# Allegro board dev.brd
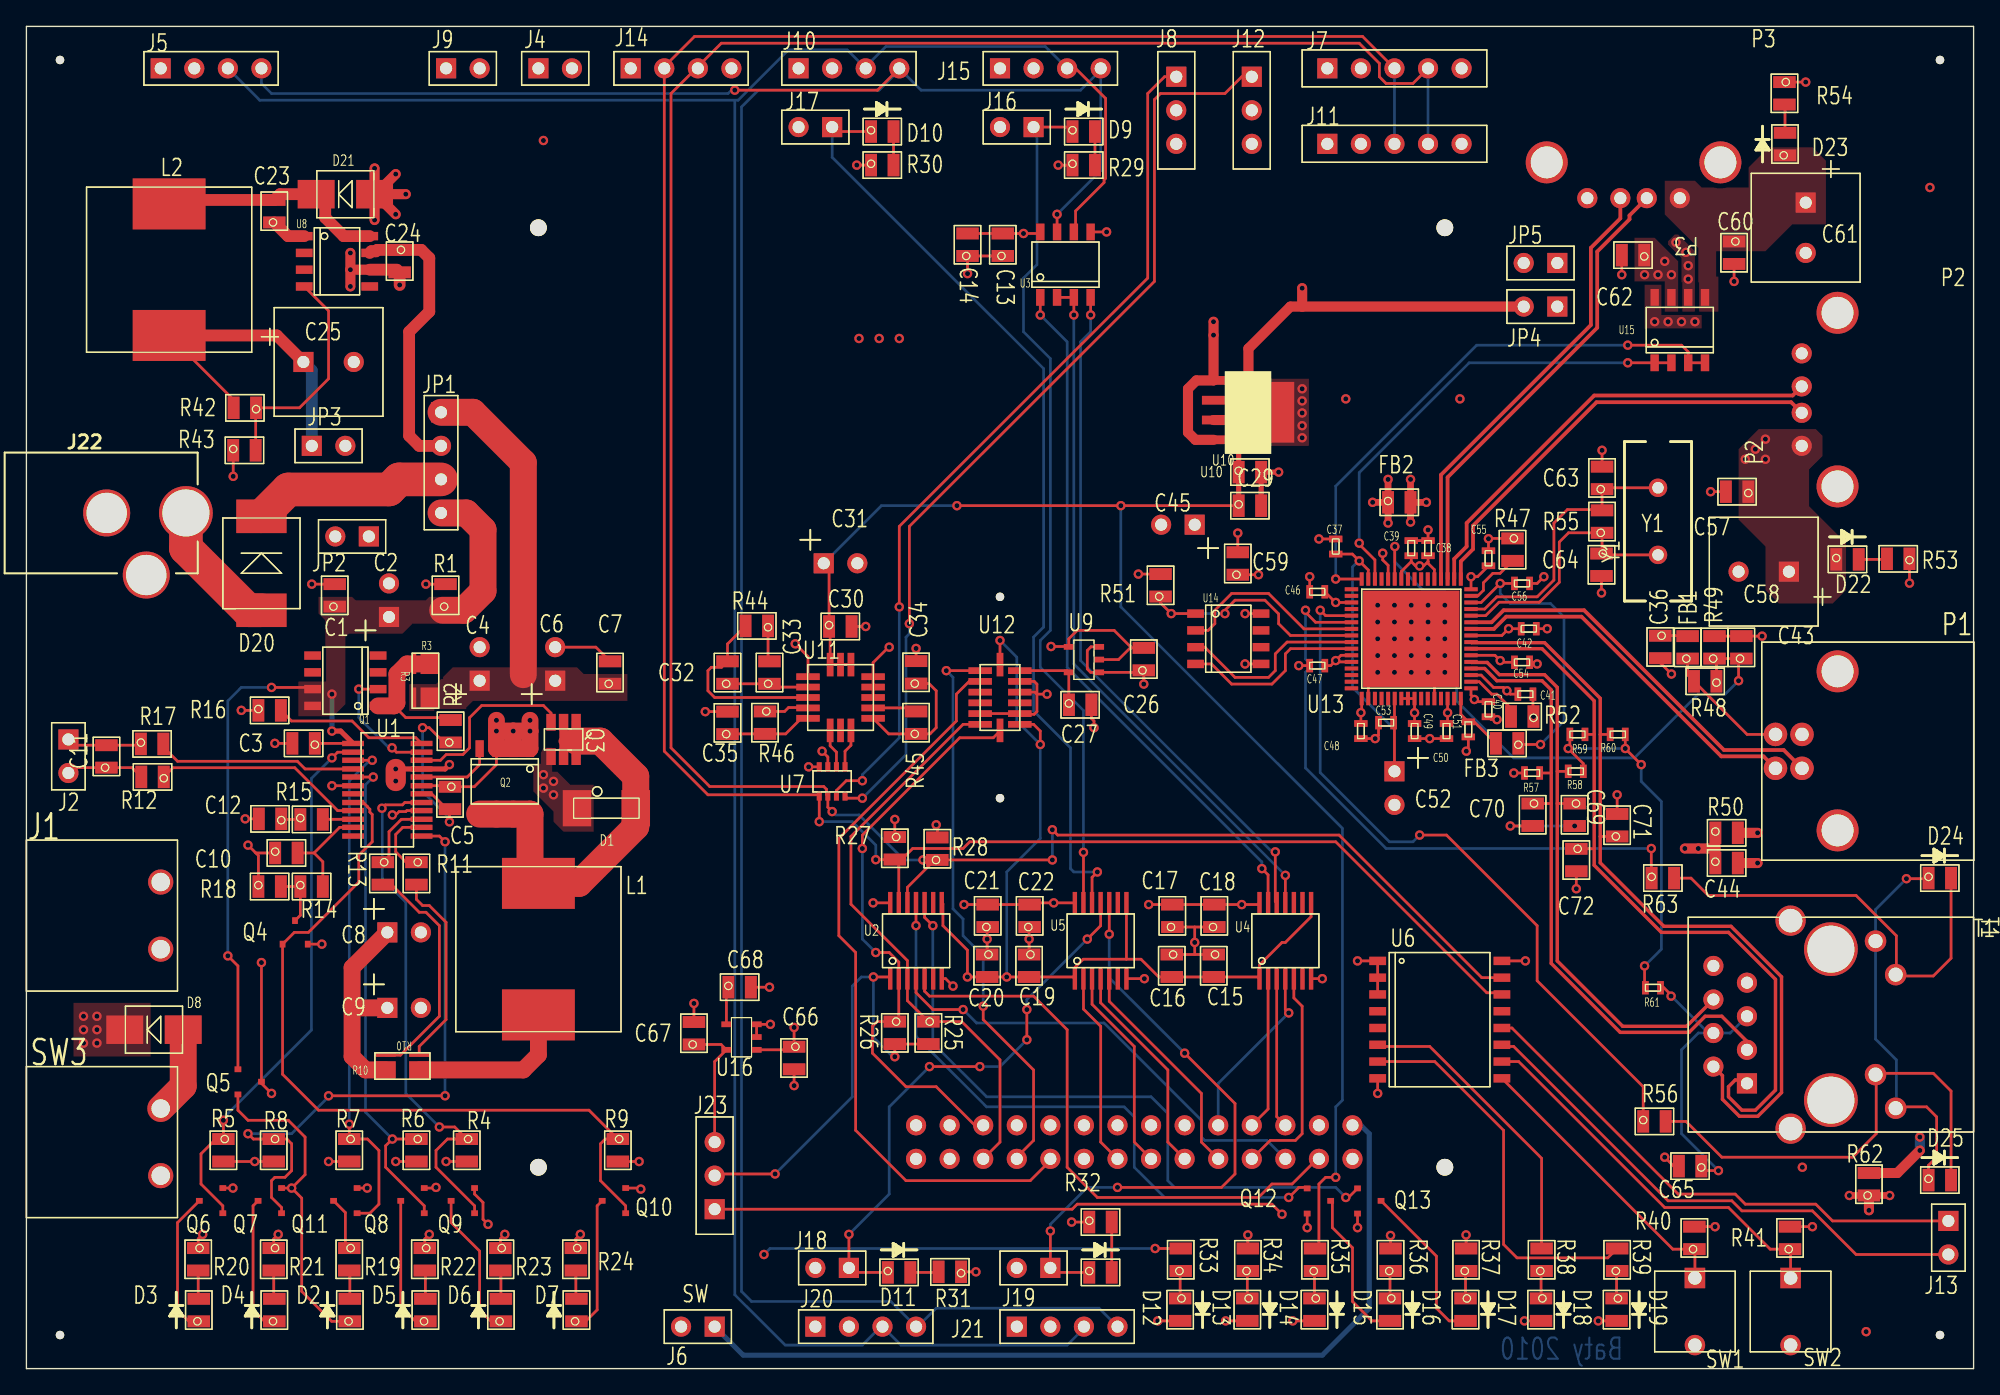
[diagram p0: board, top side]
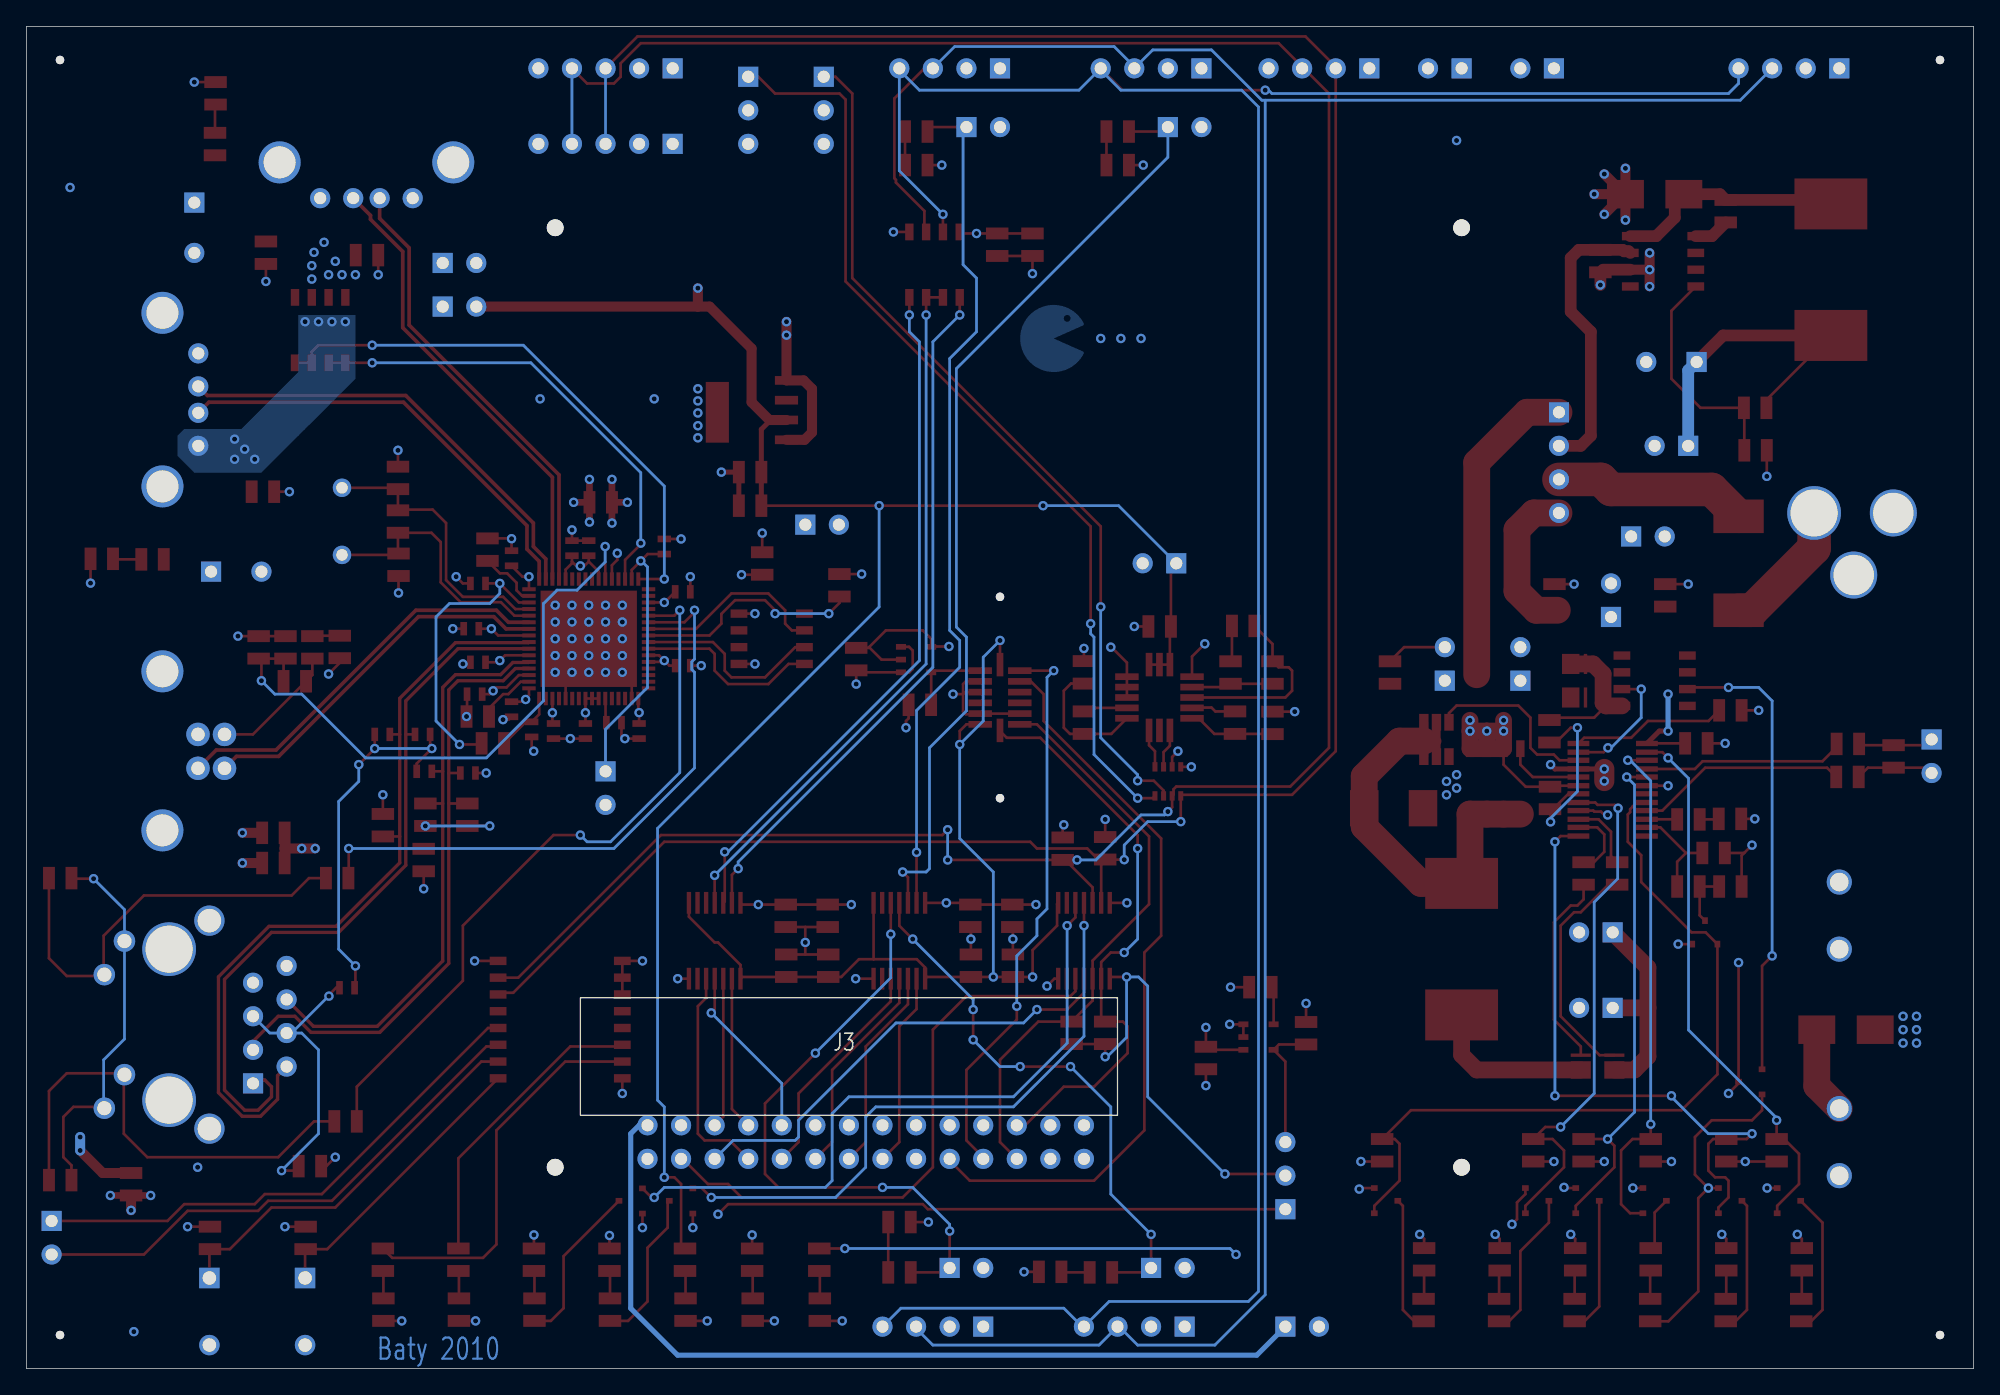
[diagram p1: board, bottom side, seen from below]

Outline 147.32 x 101.6 mm; copper layers: TOP, INNER_GND, INNER_POWER, BOTTOM. Coordinates in mm from the lower left corner of the outline.
Outline path: 0,101.6 0,0 147.32,0 147.32,101.6 0,101.6

## Design rules (mm)
nets with their own width: min track width 0.508; nets DCIN

## Placement (name value [footprint] x y rotation side)
C1  0.1u  [0805]  25.53 59.18 90 top
C2  10u  [CAP200_100_36]  27.43 58.17 90 top
C3  0.1u  [0805]  20.32 49.53 180 top
C4  10u  [CAP200_100_36]  34.29 53.34 90 top
C5  15n  [0805]  29.84 42.55 270 top
C6  10u  [CAP200_100_36]  40.01 53.34 90 top
C7  0.0047u  [0805]  46.36 53.34 90 top
C8  10u  [CAP200_100_36]  28.58 33.02 0 top
C9  10u  [CAP200_100_36]  28.58 27.3 0 top
C10  0.0047u  [0805]  20.32 36.83 0 top
C11  0.47u  [0805]  8.26 46.99 90 top
C12  0.12u  [0805]  17.78 43.81 180 top
C13  0.1u  [0805]  76.07 85.72 90 top
C14  1u  [0805]  73.41 85.72 90 top
C15  0.1u  [0805]  87.63 29.84 270 top
C16  1u  [0805]  84.45 29.84 270 top
C17  0.1u  [0805]  88.9 34.92 90 top
C18  1u  [0805]  92.08 34.92 90 top
C19  0.1u  [0805]  73.66 29.84 270 top
C20  1u  [0805]  70.48 29.84 270 top
C21  0.1u  [0805]  74.93 34.92 90 top
C22  1u  [0805]  78.11 34.92 90 top
C23  0.01u  [0805]  20.96 88.27 90 top
C24  1u  [0805]  26.04 83.19 270 top
C25  470u  [CAP325_150_36]  22.86 76.2 0 top
C26  1u  [0805]  86.74 54.36 90 top
C27  1u  [0805]  80.38 48.05 0 top
C28  1.0uF  [0805]  93.22 65.66 0 top
C29  0.1uF  [0805]  93.22 63.12 0 top
C30  0.1u  [0805]  62.23 53.97 0 top
C31  10u  [CAP200_100_36]  61.59 60.96 0 top
C32  10n  [0805]  55.25 53.34 90 top
C33  470n  [0805]  58.42 53.34 90 top
C34  1u  [0805]  69.51 53.36 90 top
C35  1u  [0805]  55.25 49.53 90 top
C36  1.0uF  [0805]  121.41 53.97 270 top
C37  0.1uF  [0603]  99.06 62.23 90 top
C38  0.1uF  [0603]  106.04 62.1 90 top
C39  0.1uF  [0603]  104.78 62.1 90 top
C40  0.1uF  [0603]  110.62 49.91 270 top
C41  0.1uF  [0603]  113.41 51.05 0 top
C42  0.1uF  [0603]  113.66 56.01 0 top
C43  0.1uF  [0805]  131.95 55.24 90 top
C44  0.1uF  [0805]  129.29 36.07 0 top
C45  4.7uF  [CAP200_100_36]  87.12 63.88 180 top
C46  0.1uF  [0603]  97.66 58.8 180 top
C47  0.1uF  [0603]  97.66 53.21 180 top
C48  0.1uF  [0603]  100.97 48.26 270 top
C49  0.1uF  [0603]  105.03 48.26 270 top
C50  0.1uF  [0603]  107.44 48.26 270 top
C51  0.1uF  [0603]  109.09 48.39 270 top
C52  4.7uF  [CAP200_100_36]  103.5 43.94 270 top
C53  0.1uF  [0603]  102.87 48.89 180 top
C54  0.1uF  [0603]  113.16 53.47 0 top
C55  0.1uF  [0603]  110.62 61.34 90 top
C56  1.0uF  [0603]  113.16 59.44 0 top
C57  0.1uF  [0805]  128.78 68.58 180 top
C58  150uF  [CAP325_150_36]  131.44 60.32 180 top
C59  0.1uF  [0805]  93.85 61.59 90 top
C60  0.1uF  [0805]  127 83.82 270 top
C61  150uF  [CAP325_150_36]  134.62 86.36 270 top
C62  1.0uF  [0805]  120.9 86.49 180 top
C63  33pF  [0805]  121.41 68.07 90 top
C64  33pF  [0805]  116.97 60.2 270 top
C65  0.022uF  [0805]  125.22 17.53 180 top
C66  1u  [0805]  55.88 22.86 270 top
C67  1u  [0805]  52.7 26.04 90 top
C68  .01u  [0805]  54.61 26.67 0 top
C69  15p  [0805]  114.94 41.27 270 top
C70  15p  [0805]  111.76 41.27 270 top
C71  15p  [0805]  122.56 41.78 90 top
C72  15p  [0805]  115.06 37.85 270 top
D1  MBRS140T3  [SMB]  43.56 41.15 0 top
D2  GRN  [0805P]  26.67 5.08 90 top
D3  AMB  [0805P]  15.24 5.08 90 top
D4  AMB  [0805P]  20.96 5.08 90 top
D5  Red  [0805P]  32.39 5.08 90 top
D6  Red  [0805P]  38.1 5.08 90 top
D7  AMB  [0805P]  43.81 5.08 90 top
D8  Drop  [DO214AA_SMB]  9.65 25.65 180 top
D9  LED  [0805P]  80.65 91.44 0 top
D10  LED  [0805P]  65.41 91.44 0 top
D11  LED  [0805P]  66.67 5.08 0 top
D12  LED  [0805P]  81.91 5.08 0 top
D13  LED  [0805P]  85.09 3.81 270 top
D14  LED  [0805P]  90.17 3.81 270 top
D15  LED  [0805P]  95.25 3.81 270 top
D16  Red  [0805P]  100.97 3.81 270 top
D17  Green  [0805P]  106.68 3.81 270 top
D18  Red  [0805P]  112.4 3.81 270 top
D19  Green  [0805P]  118.11 3.81 270 top
D20  Reverse  [DO214AB_SMC]  17.78 60.96 90 top
D21  B240A  [DO214AA_SMB]  24.13 88.9 180 top
D22  Green  [0805P]  138.43 59.05 0 top
D23  Green  [0805P]  135.25 93.34 90 top
D24  LED  [0805P]  145.41 34.92 0 top
D25  LED  [0805P]  145.41 12.06 0 top
FB1  0.5amp 120 Ohm 100MHz  [0805]  127.89 55.24 90 top
FB2  2.0 Amp/0.05 DCR  [0805]  104.52 63.37 0 top
FB3  2.0 Amp/0.05 DCR  [0805]  111.38 49.53 180 top
J1  BAT  [CONN_PHOENIX_2_200]  10.16 31.75 90 top
J2  10k Thermistor  [SIP2_100_36]  3.18 46.35 0 top
J3  BeagleBoard_J3  [CONN2_28]  100.33 15.87 180 bottom
J4  5v  [SIP2_100_36]  40.01 98.43 90 top
J5  Motor Connector  [SIP4_100_36]  13.97 98.43 90 top
J6  Power Switch  [SIP2_100_36]  50.8 3.17 270 top
J7  USRF1  [SIP5_100_36]  103.5 98.43 90 top
J8  IR1  [SIP3_100_36]  87 95.25 0 top
J9  5v  [SIP2_100_36]  33.02 98.43 90 top
J10  Motor Connector  [SIP4_100_36]  62.23 98.43 90 top
J11  USRF2  [SIP5_100_36]  103.5 92.71 90 top
J12  IR2  [SIP3_100_36]  92.71 95.25 0 top
J13  GPIO  [SIP2_100_36]  145.41 9.91 0 top
J14  i2c1  [SIP4_100_36]  49.53 98.43 90 top
J15  Motor Connector  [SIP4_100_36]  77.47 98.43 90 top
J16  Leg1  [SIP2_100_36]  74.93 93.98 270 top
J17  Leg2  [SIP2_100_36]  59.69 93.98 270 top
J18  Leg3  [SIP2_100_36]  60.96 7.62 270 top
J19  Leg4  [SIP2_100_36]  76.2 7.62 270 top
J20  Motor Connector  [SIP4_100_36]  63.5 3.17 90 top
J21  Motor Connector  [SIP4_100_36]  78.74 3.17 90 top
J22  DC In  [BARREL5_5]  12.07 64.77 180 top
J23  CON3  [SIP3_100_36]  52.07 14.6 180 top
JP1  CON4  [SIP4_100_36]  31.37 68.58 0 top
JP2  Jumper  [SIP2_100_36]  24.64 62.99 270 top
JP3  Current Test  [SIP2_100_36]  22.86 69.85 90 top
JP4  Jumper  [SIP2_100_36]  114.55 80.39 270 top
JP5  Jumper  [SIP2_100_36]  114.55 83.69 270 top
L1  10uH  [IND615X500_150X225]  38.73 31.75 270 top
L2  39uH  [IND615X500_150X225]  10.8 83.19 270 top
NOREF  -  [unnamed]  144.78 99.06 0 top
NOREF#2  -  [unnamed]  73.66 43.18 0 top
NOREF#3  -  [unnamed#2]  38.73 86.36 0 top
NOREF#4  -  [unnamed#2]  107.31 86.36 0 top
NOREF#5  -  [unnamed]  73.66 58.42 0 top
NOREF#6  -  [unnamed#2]  38.73 15.24 0 top
NOREF#7  -  [unnamed]  144.78 2.54 0 top
NOREF#8  -  [unnamed#2]  107.31 15.24 0 top
NOREF#9  -  [unnamed]  2.54 2.54 0 top
NOREF#10  -  [unnamed]  2.54 99.06 0 top
P1  USB Type-B Right Angle  [USB_FEMALE]  132.33 48.01 270 top
P2  USB Type-A RA  [USB_A]  139.32 69.85 90 top
P3  USB Type-A RA  [USB_A]  125.09 93.6 180 top
Q1  Si4925BDY  [SOIC8]  24.13 52.07 180 top
Q2  Si4431BDY  [SOIC8]  36.2 44.45 270 top
Q3  FDC645N  [SSOT6]  40.64 47.62 270 top
Q4  2N7002  [SOT23]  20.32 33.02 90 top
Q5  2N7002  [SOT23]  16.89 21.72 0 top
Q6  TP0610T  [SOT23]  13.97 12.7 180 top
Q7  TP0610T  [SOT23]  18.42 12.7 180 top
Q8  TP0610T  [SOT23]  29.21 12.7 180 top
Q9  TP0610T  [SOT23]  33.02 12.7 180 top
Q10  TP0610T  [SOT23]  44.45 12.7 180 top
Q11  2N7002  [SOT23]  24.13 12.7 180 top
Q12  2N7002  [SOT23]  97.79 12.7 0 top
Q13  2N7002  [SOT23]  101.6 12.7 0 top
R1  10k  [0805]  33.91 59.18 90 top
R2  4.99k  [0805]  34.29 48.89 90 top
R3  0.033  [1206KELVIN]  30.48 53.34 270 top
R4  100k  [0805]  31.12 15.87 270 top
R5  100k  [0805]  12.7 15.87 270 top
R6  100k  [0805]  27.3 15.87 270 top
R7  100k  [0805]  22.23 15.87 270 top
R8  100k  [0805]  16.51 15.87 270 top
R9  100k  [0805]  42.55 15.87 270 top
R10  0.025  [1206KELVIN]  29.72 22.61 180 top
R11  3.01k  [0805]  27.3 36.83 270 top
R12  32.4k  [0805]  8.89 46.99 180 top
R13  3.01k  [0805]  24.77 36.83 270 top
R14  26.7k  [0805]  22.23 34.29 0 top
R15  6.04k  [0805]  22.23 39.37 0 top
R16  10k  [0805]  19.05 47.62 0 top
R17  309k  [0805]  10.16 45.08 0 top
R18  52.3k  [0805]  19.05 34.29 0 top
R19  300  [0805]  22.23 7.62 270 top
R20  300  [0805]  10.8 7.62 270 top
R21  300  [0805]  16.51 7.62 270 top
R22  300  [0805]  27.94 7.62 270 top
R23  300  [0805]  33.66 7.62 270 top
R24  300  [0805]  39.37 7.62 270 top
R25  3.3k  [0805]  66.04 24.76 270 top
R26  3.3k  [0805]  63.5 24.76 270 top
R27  3.3k  [0805]  63.5 38.73 270 top
R28  3.3k  [0805]  71.12 40 90 top
R29  300  [0805]  80.65 88.9 0 top
R30  300  [0805]  65.41 88.9 0 top
R31  300  [0805]  69.22 9.52 180 top
R32  300  [0805]  81.91 8.89 0 top
R33  1.5k  [0805]  89.53 8.89 90 top
R34  300  [0805]  94.62 8.89 90 top
R35  130  [0805]  99.69 8.89 90 top
R36  300  [0805]  105.41 8.89 90 top
R37  300  [0805]  111.12 8.89 90 top
R38  300  [0805]  116.84 8.89 90 top
R39  300  [0805]  122.56 8.89 90 top
R40  10k  [0805]  128.4 10.54 90 top
R41  10k  [0805]  135.64 10.54 90 top
R42  10k  [0805]  15.88 74.93 180 top
R43  3.16k  [0805]  17.15 67.31 0 top
R44  10k  [0805]  54.61 58.42 180 top
R45  33k  [0805]  69.51 49.55 90 top
R46  33k  [0805]  53.68 48.24 270 top
R47  12.0K  [0805]  110.24 61.34 270 top
R48  39.2K  [0805]  126.37 54.23 180 top
R49  61.9K  [0805]  129.92 55.24 90 top
R50  332  [0805]  129.29 38.35 0 top
R51  10.0K  [0805]  88.01 59.94 90 top
R52  12.4K  [0805]  112.52 51.56 180 top
R53  511  [0805]  140.97 63.5 180 top
R54  511  [0805]  130.81 95.88 270 top
R55  1.00M  [0805]  121.41 64.77 90 top
R56  332  [0805]  123.82 16.51 0 top
R57  49.9  [0603]  113.92 45.08 0 top
R58  49.9  [0603]  117.22 45.21 180 top
R59  49.9  [0603]  117.35 48.01 0 top
R60  49.9  [0603]  120.4 48.01 180 top
R61  10.0  [0603]  123.06 28.83 0 top
R62  0  [0805]  141.6 14.6 90 top
R63  332  [0805]  124.46 34.92 0 top
SW1  Switch1  [TOUCHSWITCH]  126.24 4.32 0 top
SW2  Switch2  [TOUCHSWITCH]  133.48 4.32 0 top
SW3  Motor Power Switch  [CONN_PHOENIX_2_200]  10.16 14.6 90 top
T1  Pulse - J0011D01B  [ETHERNET]  130.18 21.59 270 top
U1  LTC4007  [SSOP24N]  27.3 43.81 0 top
U2  MAX3378  [TSSOP14]  67.31 32.38 90 top
U3  SN65HVD07D  [SOIC8]  78.61 83.57 90 top
U4  MAX3378  [TSSOP14]  95.25 32.38 90 top
U5  MAX3378  [TSSOP14]  81.28 32.38 90 top
U6  PCA8574A  [SOIC16W]  106.93 26.42 0 top
U7  AD7991  [SOT23-8]  60.96 44.45 90 top
U8  tps5420d  [SOIC8]  23.5 83.82 0 top
U9  TPS78223  [SOT-23A]  81.15 52.7 90 top
U10  LP38693MP-3.3  [SOT223-5]  91.31 71.88 0 top
U11  LPR510AL  [LGA16L]  61.59 50.8 0 top
U12  ADXL345  [LGA14]  73.66 50.8 180 top
U13  a  [QFN64]  104.78 55.24 270 top
U14  93LC66A  [SOIC8]  90.93 55.24 0 top
U15  MIC2026-1BM  [SOIC8]  125.09 78.61 90 top
U16  TPS79118  [SOT-23A]  55.25 24.13 90 top
Y1  25.000MHz  [HC49US_TH]  123.44 59.05 90 top

## Library data of the parts
C1-C27 C30-C35 C66-C72 = C
C28 C36 = CAP_1.0.uF/10%/16V/X5R/0603
C29 C43 C44 C57 C60 = CAP_0.1uF/10%/16V/X7R/0603
C37-C42 C46-C51 C53-C55 C59 = CAP_0.1uF/10%/10V/X5R/0402
C45 C52 = CAP_4.7uF/20%/6.3V/X5R/0603
C56 C62 = CAP_1.0.uF/10%/6P3V/X5R/0402
C58 C61 = 150uF-10V-20%-LESR-ALUM-SMD_6x6
C63 C64 = CAP_33pF/5%/50V/COG/0402
C65 = CAP_7
D1 = DIODE SCHOTTKY
D2-D7 D9-D19 D24 D25 = LED
D8 D20 D21 = D1N4001
D22 D23 = LED/GREEN/0805/SMD_0
FB1 = FB_500mA/100Mhz/120 Ohm/0603
FB2 FB3 = FB_2.0A/100MHz/0.05DCR/0603 Pwr
J1 J2 J4 J6 J9 J13 J16-J19 = CON2
J3 = BeagleBoard_J3
J5 J10 J15 J20 J21 = ConMotor
J7 J11 = CON5
J8 J12 J22 J23 = CON3
J14 JP1 = CON4
JP2-JP5 = JumperH_0
L1 L2 = L
P1 = USB RA Upstream Type B ROHS
P2 P3 = USB Type A RA
Q1 = MOSFET P_6: Tolerance: ***; User Part Number: ***
Q2 = MOSFET P_4: Tolerance: ***; User Part Number: ***
Q3 = MOSFET N_2
Q4 = MOSFET N_0
Q5 Q11-Q13 = 2N7002
Q6-Q10 = MOSFET P_0
R1 R2 R4-R9 R11-R46 = R
R3 R10 = RKelvin_0
R47 = 12.0K-1/10W-1%-0603 - Yageo
R48 = 39.2K-1/10W-1%-0603
R49 = 61.9K-1/10W-1%-0603
R50 R56 R63 = 332-1/10W-1%-0603
R51 = 10.0K-1/16W-1%-0402
R52 = 12.4K-1/10W-1%-0603
R53 R54 = 511-1/10W-1%-0603
R55 = 1.00M-1/10W-1%-0603
R57-R60 = 49.9-1/16W-1%-0402
R61 = 10.0-1/16W-1%-0402
R62 = R_0
SW1-SW3 = SW PUSHBUTTON-SPST
T1 = Pulse - J0011D01B_1
U1 = LTC4007
U2 U4 U5 = MAX3378: Tolerance: ***; User Part Number: ***
U3 = SN65HVD07D: Tolerance: ***; User Part Number: ***
U6 = PCA8574D: Tolerance: ***; User Part Number: ***
U7 = AD7991
U8 = tps5420d_1: Tolerance: ***; User Part Number: ***
U9 = TPS78223
U10 = LP38693MP-3.3/NOPB SOT223_5
U11 = LPR510AL
U12 = ADXL345
U13 = lan9512
U14 = 93LC66A_0: Tolerance: ***; User Part Number: ***
U15 = MIC2026-1BM - Dual PWR Switch: Tolerance: ***; User Part Number: ***
U16 = TPS79118
Y1 = Suntsu 25MHz _0.005% 20pf

## Footprints (pads in the part's own frame, mm; a bottom-side part is the same pattern mirrored in y, then rotated)
0603
  rect 0.508x1.016 smd: 1(-0.572,0) 2(0.572,0)
0805
  rect 0.9x1.7 smd: 1(-1.501,2.202) 2(0.2,2.202)
0805P
  rect 0.9x1.7 smd: 1(-1.501,2.202) 2(0.2,2.202)
1206KELVIN
  rect 1.524x1.321 smd: 1(0,0) 2(2.54,0)
  rect 1.524x0.254 smd: 3(0,-1.118) 4(2.54,-1.118)
BARREL5_5
  round 4.064 hole 3.556: 1(0,0)
  round 3.556 hole 3.048: 2(5.994,0) 3(2.997,4.699)
CAP200_100_36
  rect 1.524x1.524 hole 0.914: 1(-1.27,0)
  round 1.524 hole 0.914: 2(1.27,0)
CAP325_150_36
  rect 1.524x1.524 hole 0.914: 1(-1.905,0)
  round 1.524 hole 0.914: 2(1.905,0)
CONN2_28
  round 1.524 hole 0.914: 1(0,0) 2(0,2.54) 3(2.54,0) 4(2.54,2.54) 5(5.08,0) 6(5.08,2.54) 7(7.62,0) 8(7.62,2.54) 9(10.16,0) 10(10.16,2.54) 11(12.7,0) 12(12.7,2.54) 13(15.24,0) 14(15.24,2.54) 15(17.78,0) 16(17.78,2.54) 17(20.32,0) 18(20.32,2.54) 19(22.86,0) 20(22.86,2.54) 21(25.4,0) 22(25.4,2.54) 23(27.94,0) 24(27.94,2.54) 25(30.48,0) 26(30.48,2.54) 27(33.02,0) 28(33.02,2.54)
CONN_PHOENIX_2_200
  round 1.905 hole 1.397: 1(0,0) 2(5.08,0)
DO214AA_SMB
  rect 2.794x2.159 smd: 1(-2.21,0) 2(2.21,0)
DO214AB_SMC
  rect 2.54x3.81 smd: 1(-3.556,0) 2(3.556,0)
ETHERNET
  rect 1.524x1.524 hole 0.914: 1(0,0)
  round 1.524 hole 0.914: 2(-1.27,-2.54) 3(-2.54,0) 4(-3.81,-2.54) 5(-5.08,0) 6(-6.35,-2.54) 7(-7.62,0) 8(-8.89,-2.54)
  round 1.626 hole 1.067: 9(1.88,11.252) 10(-0.66,9.728) 11(-8.23,11.252) 12(-10.77,9.728)
  round 2.286 hole 1.778: 13(3.429,3.302) 14(-12.319,3.302)
  round 4.064 hole 3.556: 15(1.27,6.35) 16(-10.16,6.35)
HC49US_TH
  round 1.397 hole 0.864: 1(2.54,0) 2(7.62,0)
IND615X500_150X225
  rect 3.861x5.512 smd: 1(-4.978,0) 2(4.978,0)
LGA14
  rect 1.778x0.508 smd: 1(-1.499,2.032) 2(-1.499,1.219) 3(-1.499,0.406) 4(-1.499,-0.406) 5(-1.499,-1.219) 6(-1.499,-2.032) 8(1.499,-2.032) 9(1.499,-1.219) 10(1.499,-0.406) 11(1.499,0.406) 12(1.499,1.219) 13(1.499,2.032)
  rect 0.508x1.778 smd: 7(0,-2.489) 14(0,2.489)
LGA16L
  rect 1.778x0.508 smd: 1(-2.464,1.575) 2(-2.464,0.787) 3(-2.464,0) 4(-2.464,-0.787) 5(-2.464,-1.575) 9(2.464,-1.575) 10(2.464,-0.787) 11(2.464,0) 12(2.464,0.787) 13(2.464,1.575)
  rect 0.508x1.778 smd: 6(-0.787,-2.489) 7(0,-2.489) 8(0.787,-2.489) 14(0.787,2.489) 15(0,2.489) 16(-0.787,2.489)
QFN64
  rect 1.016x0.305 smd: 1(-4.523,3.75) 2(-4.523,3.25) 3(-4.523,2.75) 4(-4.523,2.25) 5(-4.523,1.75) 6(-4.523,1.25) 7(-4.523,0.75) 8(-4.523,0.25) 9(-4.523,-0.25) 10(-4.523,-0.75) 11(-4.523,-1.25) 12(-4.523,-1.75) 13(-4.523,-2.25) 14(-4.523,-2.75) 15(-4.523,-3.25) 16(-4.523,-3.75) 33(4.523,-3.75) 34(4.523,-3.25) 35(4.523,-2.75) 36(4.523,-2.25) 37(4.523,-1.75) 38(4.523,-1.25) 39(4.523,-0.75) 40(4.523,-0.25) 41(4.523,0.25) 42(4.523,0.75) 43(4.523,1.25) 44(4.523,1.75) 45(4.523,2.25) 46(4.523,2.75) 47(4.523,3.25) 48(4.523,3.75)
  rect 0.305x1.016 smd: 17(-3.75,-4.523) 18(-3.25,-4.523) 19(-2.75,-4.523) 20(-2.25,-4.523) 21(-1.75,-4.523) 22(-1.25,-4.523) 23(-0.75,-4.523) 24(-0.25,-4.523) 25(0.25,-4.523) 26(0.75,-4.523) 27(1.25,-4.523) 28(1.75,-4.523) 29(2.25,-4.523) 30(2.75,-4.523) 31(3.25,-4.523) 32(3.75,-4.523) 49(3.75,4.523) 50(3.25,4.523) 51(2.75,4.523) 52(2.25,4.523) 53(1.75,4.523) 54(1.25,4.523) 55(0.75,4.523) 56(0.25,4.523) 57(-0.25,4.523) 58(-0.75,4.523) 59(-1.25,4.523) 60(-1.75,4.523) 61(-2.25,4.523) 62(-2.75,4.523) 63(-3.25,4.523) 64(-3.75,4.523)
  rect 7.29x7.29 smd: 65(0,0)
SIP2_100_36
  rect 1.524x1.524 hole 0.914: 1(0,1.27)
  round 1.524 hole 0.914: 2(0,-1.27)
SIP3_100_36
  rect 1.524x1.524 hole 0.914: 1(0,2.54)
  round 1.524 hole 0.914: 2(0,0) 3(0,-2.54)
SIP4_100_36
  rect 1.524x1.524 hole 0.914: 1(0,3.81)
  round 1.524 hole 0.914: 2(0,1.27) 3(0,-1.27) 4(0,-3.81)
SIP5_100_36
  rect 1.524x1.524 hole 0.914: 1(0,5.08)
  round 1.524 hole 0.914: 2(0,2.54) 3(0,0) 4(0,-2.54) 5(0,-5.08)
SMB
  rect 2.159x2.743 smd: 1(-1.905,1.27) 2(2.54,1.27)
SOIC8
  rect 1.27x0.635 smd: 1(-2.477,1.905) 2(-2.477,0.635) 3(-2.477,-0.635) 4(-2.477,-1.905) 5(2.477,-1.905) 6(2.477,-0.635) 7(2.477,0.635) 8(2.477,1.905)
SOIC16W
  rect 1.27x0.635 smd: 1(-4.699,4.445) 2(-4.699,3.175) 3(-4.699,1.905) 4(-4.699,0.635) 5(-4.699,-0.635) 6(-4.699,-1.905) 7(-4.699,-3.175) 8(-4.699,-4.445) 9(4.699,-4.445) 10(4.699,-3.175) 11(4.699,-1.905) 12(4.699,-0.635) 13(4.699,0.635) 14(4.699,1.905) 15(4.699,3.175) 16(4.699,4.445)
SOT23
  rect 0.508x0.432 smd: 1(-0.889,0.94) 2(-0.889,-0.965) 3(0.889,0)
SOT23-8
  rect 0.711x0.381 smd: 1(-1.1,0.975) 2(-1.1,0.325) 3(-1.1,-0.325) 4(-1.1,-0.975) 5(1.1,-0.975) 6(1.1,-0.325) 7(1.1,0.325) 8(1.1,0.975)
SOT223-5
  rect 1.753x0.66 smd: 1(-1.499,2.921) 2(-1.499,1.422) 3(-1.499,-0.076) 4(-1.499,-1.575)
  rect 1.753x4.597 smd: 5(3.734,0.508)
SOT-23A
  rect 0.432x0.762 smd: 1(0,0) 2(0.965,0) 3(1.93,0) 4(1.93,2.286) 5(0,2.286)
SSOP24N
  rect 1.651x0.406 smd: 1(-2.591,3.505) 2(-2.591,2.845) 3(-2.591,2.235) 4(-2.591,1.575) 5(-2.591,0.965) 6(-2.591,0.305) 7(-2.591,-0.305) 8(-2.591,-0.965) 9(-2.591,-1.575) 10(-2.591,-2.235) 11(-2.591,-2.845) 12(-2.591,-3.505) 13(2.591,-3.505) 14(2.591,-2.845) 15(2.591,-2.235) 16(2.591,-1.575) 17(2.591,-0.965) 18(2.591,-0.305) 19(2.591,0.305) 20(2.591,0.965) 21(2.591,1.575) 22(2.591,2.235) 23(2.591,2.845) 24(2.591,3.505)
SSOT6
  rect 1.27x0.711 smd: 1(-1.3,0.95) 2(-1.3,0) 3(-1.3,-0.95) 4(1.3,-0.95) 5(1.3,0) 6(1.3,0.95)
TOUCHSWITCH
  rect 1.549x1.549 hole 1.016: 1(0,2.54)
  round 1.549 hole 1.016: 2(0,-2.54)
TSSOP14
  rect 1.651x0.33 smd: 1(-2.87,1.956) 2(-2.87,1.306) 3(-2.87,0.655) 4(-2.87,0.005) 5(-2.87,-0.645) 6(-2.87,-1.295) 7(-2.87,-1.946) 8(2.87,-1.946) 9(2.87,-1.295) 10(2.87,-0.645) 11(2.87,0.005) 12(2.87,0.655) 13(2.87,1.306) 14(2.87,1.956)
unnamed
  round 0.635 hole 3.175 unplated: (0,0)
unnamed#2
  round 1.27 hole 3.962 unplated: (0,0)
USB_A
  round 1.524 hole 0.914: 1(0,5) 2(2.5,5) 3(4.5,5) 4(7,5)
  round 3.175 hole 2.413: 5(-3.07,2.29) 6(10.07,2.29)
USB_FEMALE
  round 1.778 hole 1.016: 1(0,0) 2(2.565,0) 3(2.565,2.007) 4(0,2.007)
  round 3.175 hole 2.413: 5(-4.775,4.699) 6(7.264,4.699)

## Nets
1.8V: C15.2 C16.2 C19.2 C20.2 J23.2 R25.2 R26.2 U2.1(VL) U2.8(T\H\R\E\E\-\S\T\A\T\E\) U4.1(VL) U4.8(T\H\R\E\E\-\S\T\A\T\E\) U5.1(VL) U5.8(T\H\R\E\E\-\S\T\A\T\E\) U12.1(VDD I/O) U12.7(C\S\)
1.8V_BEAGLE: J3.1(VIO_1V8) J23.1
1.8V_LINEAR: C67.1 J23.3 U16.5(VOUT)
2.3V: C27.1 U9.5(OUT) U12.6(VS)
3.3V: C28.1 C29.1 C30.1 C31.1 JP4.2 R35.2 U10.3(VOUT) U11.14(RES1) U11.15(RES2) U11.16(VDD)
5V: C13.2 C14.2 C17.2 C18.2 C21.2 C22.2 C26.1 C66.1 J4.2 J6.2 J7.5 J8.3 J9.2 J11.5 J12.3 J14.4 J16.2 J17.2 J18.2 J19.2 JP2.1 JP3.2 JP5.2 R27.1 R28.2 R34.2 R36.2 R37.2 R40.2 R41.2 U2.14(VCC) U3.8(VCC) U4.14(VCC) U5.14(VCC) U6.16(VDD) U7.8(VDD) U9.1(IN) U9.3(EN) U10.1(VEN) U10.4(VIN) U16.1(VIN)
5V_BEAGLE: J3.2(DC_5V) J6.1
5V_JUMPERED: JP2.2 Q5.3(DRAIN) R4.2 R5.2 R6.2 R7.2 R8.2 R9.2
+3.3V: C45.1 C46.1 C47.1 C48.1 C49.1 C50.1 C59.1 D24.1(ANODE) D25.1(ANODE) FB2.1 JP4.1 T1.9(GRN_A) T1.12(YEL_A) U13.12(N_RESET) U13.19(VDD33IO#19) U13.27(VDD33IO#27) U13.28(NTRST) U13.33(VDD33IO#33) U13.39(VDD33IO#39) U13.40(TEST3) U13.41(AUTOMDIX_EN) U13.46(VDD33IO#46) U14.8(VCC)
+5V: C62.1 JP5.1 U15.7(IN)
GND_CHASSIS: R62.2 T1.8(CHS GND) T1.13(GND1) T1.14(GND2) T1.15(MTG1) T1.16(MTG2)
GND_USB: C44.2 P1.5(SHLD1) P1.6(SHLD2) P2.5(SHLD1) P2.6(SHLD2) P3.5(SHLD1) P3.6(SHLD2) R50.2
VBUS_DET: C43.1 R48.1 R49.1 U13.11(VBUS_DET)
VCC_USB: C36.1 FB1.2
VDD18CORE: C37.1 C52.1 C53.1 U13.15(VDD18CORE#15) U13.38(VDD18CORE#38)
VDD18ETHPLL: C51.1 FB3.2 U13.48(VDD18ETHPLL)
VDD18USBPLL: C56.1 FB3.1 U13.62(VDD18USBPLL)
VDDA33: C38.1 C39.1 C40.1 C41.1 C42.1 C54.1 C55.1 FB2.2 R57.1 R58.1 R59.1 R60.1 R61.1 U13.5(VDD33A#5) U13.10(VDD33A#10) U13.49(VDD33A#49) U13.51(VDD33A#51) U13.54(VDD33A#54) U13.57(VDD33A#57) U13.64(VDD33A#64)
0: C1.2 C2.2 C3.2 C4.2 C6.2 C7.2 C8.2 C9.2 C10.1 C11.2 C12.2 C13.1 C14.1 C15.1 C16.1 C17.1 C18.1 C19.1 C20.1 C21.1 C22.1 C24.2 C25.2 C26.2 C27.2 C28.2 C29.2 C30.2 C31.2 C34.2 C35.2 C36.2 C37.2 C38.2 C39.2 C40.2 C41.2 C42.2 C43.2 C44.1 C45.2 C46.2 C47.2 C48.2 C49.2 C50.2 C51.2 C52.2 C53.2 C54.2 C55.2 C56.2 C57.2 C58.2 C59.2 C60.2 C61.2 C62.2 C63.2 C64.2 C65.2 C66.2 C67.2 C68.2 C69.2 C70.2 C71.2 C72.2 D1.1(ANODE) D13.2(CATHODE) D14.2(CATHODE) D15.2(CATHODE) D18.2(CATHODE) D19.2(CATHODE) D21.1 J1.2 J2.1 J3.27(GND1) J3.28(GND2) J4.1 J5.1(GND) J7.1 J8.2 J9.1 J10.1(GND) J11.1 J12.2 J14.1 J15.1(GND) J20.1(GND) J21.1(GND) J22.2 P1.4(GND) P2.4(GND) P3.4(GND) Q3.4(SOURCE) Q4.2(SOURCE) Q11.2(SOURCE) Q12.2(SOURCE) Q13.2(SOURCE) R1.2 R16.1 R17.1 R18.1 R20.1 R21.1 R22.1 R23.1 R24.1 R29.1 R30.1 R31.1 R32.1 R43.1 R47.1 R49.2 R50.1 R51.2 R52.1 R53.1 R54.1 R62.1 SW1.2 SW2.2 U1.6(GND) U1.16(CHEM) U1.21(PGND) U2.7(GND) U3.5(GND) U4.7(GND) U5.7(GND) U6.1(AD0) U6.2(AD1) U6.3(AD2) U6.8(VSS) U7.7(GND) U8.6(GND) U9.2(GND1) U9.4(GND2) U10.5(GND) U11.1(GND) U11.11(ST) U11.12(PD) U11.13(HP) U12.2(GND1) U12.4(GND2) U12.5(GND3) U12.12(ALT ADDRESS) U13.34(TEST2) U13.44(CLK24_EN) U13.65(VSS(FLAG)) U14.5(GND) U15.6(GND) U16.2(GND) U16.3(E\N\)
A: J5.3(D+) J10.3(D+) J15.3(D+) J20.3(D+) J21.3(D+) U3.6(A)
ACCEL_INT1: J3.21(MMC2_CLKO) U12.8(INT1)
ACCEL_INT2: J3.19(MMC2_CMD/MCSPI3_SIMO) U12.9(INT2)
ACP_L: Q11.1(GATE) R7.1 U1.3(ACP)
B: J5.4(D-) J10.4(D-) J15.4(D-) J20.4(D-) J21.4(D-) U3.7(B)
BATTERY_OUT: C4.1 C5.1 C6.1 C7.1 JP1.1 Q2.1(SOURCE) Q2.2(SOURCE2) Q2.3(SOURCE3) R3.2 R3.4 U1.19(CLN)
CHG_L: Q6.1(GATE) R5.1 U1.2(C\H\G\)
DCIN: D20.2 JP1.3
DCIN_JUMPERED: C1.1 C2.1 C3.1 JP1.4 Q1.7(DRAIN) Q1.8(DRAIN2) Q5.1(GATE) R1.1 U1.1(DCIN)
EECLK: U13.23(EECLK) U14.2(CLK)
EECS: R51.1 U13.24(EECS) U14.1(CS)
EEDI: U13.26(EEDI) U14.4(DO)
EEDO: U13.25(EEDO) U14.3(DIN)
FAULT_L: Q8.1(GATE) R6.1 U1.5(F\A\U\L\T\)
FLAG_L: Q9.1(GATE) R4.1 U1.17(F\L\A\G\)
GPIO_1_5V: J13.1 U6.12(P7)
GPIO_2_5V: J13.2 U6.11(P6)
GPIO_133: J3.15(MMC_DAT1) U5.2(IOVL1)
GPIO_134: J3.13(MMC2_DAT2/MCSPI3_CS1) U5.3(IOVL2)
GPIO_135: J3.11(MMC2_DAT3/MCBSP3_DR) U5.4(IOVL3)
GPIO_136: J3.9(MMC_DAT4) U5.5(IOVL4)
GPIO_136_5V: U6.13(\I\N\T)
GPIO_137: J3.7(MMC_DAT5) U4.5(IOVL4)
GPIO_137_5V: U4.10(IOVCC4)
GPIO_138: J3.5(MMC_DAT6) U2.4(IOVL3)
GPIO_139: J3.3(MMC_DAT7) U2.5(IOVL4)
GPIO_LED1: Q12.1(GATE) U2.11(IOVCC3)
GPIO_LED2: Q13.1(GATE) U2.10(IOVCC4)
GPIO_SW1: R40.1 SW1.1 U6.9(P4)
GPIO_SW2: R41.1 SW2.1 U6.10(P5)
I2C2_SCL: J3.24(I2C2_SCL) R26.1 U2.2(IOVL1) U12.14(SCL)
I2C2_SDA: J3.23(I2C2_SDA) R25.1 U2.3(IOVL2) U12.13(SDA)
ICI_L: Q7.1(GATE) R8.1 U1.13(I\C\L\)
IND_GREEN: R39.2 U6.7(P3)
IND_RED: R38.2 U6.6(P2)
IR1_OUT: J8.1 U7.3(VIN0)
IR2_OUT: J12.1 U7.4(VIN1)
LEG1: D9.1(ANODE) J16.1 U5.13(IOVCC1)
LEG2: D10.1(ANODE) J17.1 U5.12(IOVCC2)
LEG3: D11.1(ANODE) J18.1 U5.11(IOVCC3)
LEG4: D12.1(ANODE) J19.1 U5.10(IOVCC4)
LOBAT_L: Q4.1(GATE) Q10.1(GATE) R9.1 U1.8(L\O\B\A\T\)
MOTOR_POWER: D8.1 SW3.2
NLNKA_LED_GPIO1: R56.1 U13.21(NLNKA_LED/GPIO1)
NSPD_LED_GPIO2: R63.1 U13.22(NSPD_LED/GPIO2)
OUTX: U7.5(VIN2) U11.8(4XOUTX)
OUTY: U7.6(VIN3/VREF) U11.6(4XOUTY)
PRTCTL2: U13.14(PRTCTL2) U15.1(ENA) U15.2(F\L\G\A\)
PRTCTL3: U13.16(PRTCTL3) U15.3(F\L\G\B\) U15.4(ENB)
PWR2: C57.1 C58.1 D22.1(ANODE) P2.1(VCC) U15.8(OUTA)
PWR3: C60.1 C61.1 D23.1(ANODE) P3.1(VCC) U15.5(OUTB)
RXN: C69.1 R58.2 T1.6(RD-) U13.53(RXN)
RXP: C70.1 R57.2 T1.3(RD+) U13.52(RXP)
SCL: J7.3 J11.3 J14.2 R27.2 U2.13(IOVCC1) U6.14(SCL) U7.1(SCL)
SDA: J7.4 J11.4 J14.3 R28.1 U2.12(IOVCC2) U6.15(SDA) U7.2(SDA)
SYSTEM_POWER: C24.1 JP1.2 R33.2 SW3.1 U8.7(VIN)
TXN: C71.1 R60.2 T1.2(TD-) U13.56(TXN)
TXP: C72.1 R59.2 T1.1(TD+) U13.55(TXP)
UART2_RTS: J3.10(UART2_RTS/MCBSP3_DR/GPT10_PWMEV) U4.4(IOVL3)
UART2_RTS_5V: U3.2(R\E\) U3.3(DE) U4.11(IOVCC3)
UART2_RX: J3.8(MCBSP3_FSX/UART2_RX) U4.2(IOVL1)
UART2_RX_5V: U3.1(R) U4.13(IOVCC1)
UART2_TX: J3.6(UART2_TX/MCBSP3_CLKX/GPT11_PWME) U4.3(IOVL2)
UART2_TX_5V: U3.4(D) U4.12(IOVCC2)
USBDM0: P1.2(D-) U13.58(USBDM0)
USBDM2: P2.2(D-) U13.1(USBDM2)
USBDM3: P3.2(D-) U13.3(USBDM3)
USBDP0: P1.3(D+) U13.59(USBDP0)
USBDP2: P2.3(D+) U13.2(USBDP2)
USBDP3: P3.3(D+) U13.4(USBDP3)
VSENSE: R42.1 R43.2 U8.4(VSENSE)
X: Q1.3
X2: Q1.4
X3: Q1.5
X4: Q1.6
XI: C63.1 R55.2 U13.61(XI) Y1.2
XO: C64.1 R55.1 U13.60(XO) Y1.1
N01423: C23.2 D21.2 L2.1 U8.8(PH)
N04155: C25.1 JP3.1 L2.2 R42.2
N011906: C23.1 U8.1(BOOT)
N13430: D8.2 J5.2(VDD) J10.2(VDD) J15.2(VDD) J20.2(VDD) J21.2(VDD)
N62959: D13.1(ANODE) R33.1
N63013: D14.1(ANODE) R34.1
N63069: D15.1(ANODE) R35.1
N68561: D16.1(ANODE) R36.1
N68727: D17.1(ANODE) R37.1
N80272: FB1.1 P1.1(VCC) R48.2
N82456: R52.2 U13.50(EXRES)
N82538: R47.2 U13.63(USBRBIAS)
N82716: D22.2(CATHODE) R53.2
N82728: D23.2(CATHODE) R54.2
N319567: D20.1 J22.1
N326873: D25.2(CATHODE) R56.2 T1.10(GRN_C)
N326905: D24.2(CATHODE) R63.2 T1.11(YEL_C)
N327025: C65.1 R61.2 T1.4(TXCT) T1.5(RXCT)
N332943: C32.1 C33.1 U11.2(FILTVDD)
N333191: C32.2 R44.2 U11.3(VCOUT)
N334479: C33.2 R44.1
N336810: R46.1 U11.4(OUTY)
N337129: C35.1 R46.2 U11.5(4XINY)
N339513: C34.1 R45.1 U11.9(4XINX)
N339660: R45.2 U11.10(OUTX)
N386062: R15.2 U1.10(ITH)
N389497: C10.2 R14.2 U1.11(PROG)
N391921: R11.1 U1.14(CSP)
N392257: R13.1 U1.15(BAT)
N399558: R17.2 U1.4(RT)
N400833: C11.1 J2.2 R12.2
N409831: Q1.2(GATE) U1.23(INFET)
N413652: Q1.1(SOURCE) R2.2 R3.1 R3.3
N415572: C5.2 R2.1 U1.18(CLP)
N422913: R12.1 U1.9(NTC)
N437811: R10.3 R11.2
N452896: Q2.4(GATE) U1.20(TGATE)
N454452: D1.2(CATHODE) L1.1 Q2.5(DRAIN) Q2.6(DRAIN2) Q2.7(DRAIN3) Q2.8(DRAIN4) Q3.1(DRAIN) Q3.2(DRAIN2) Q3.5(DRAIN3) Q3.6(DRAIN4)
N458500: L1.2 R10.1
N459016: C8.1 C9.1 J1.1 R10.2
N486422: Q4.3(DRAIN) R14.1 R18.2
N496196: R16.2 U1.24(SHDN)
N505980: C12.1 R15.1
N522708: D2.1(ANODE) Q5.2(SOURCE) Q6.2(SOURCE) Q7.2(SOURCE) Q8.2(SOURCE) Q9.2(SOURCE) Q10.2(SOURCE)
N533345: D4.1(ANODE) Q7.3(DRAIN)
N533657: D5.1(ANODE) Q8.3(DRAIN)
N534292: D7.1(ANODE) Q10.3(DRAIN)
N534760: D6.1(ANODE) Q9.3(DRAIN)
N535078: D3.1(ANODE) Q6.3(DRAIN)
N683674: D18.1(ANODE) R38.1
N683987: D19.1(ANODE) R39.1
N685531: D16.2(CATHODE) Q12.3(DRAIN)
N687191: D17.2(CATHODE) Q13.3(DRAIN)
N709551: U6.4(P0)
N709908: U6.5(P1)
N795614: R10.4 R13.2
N834774: Q3.3(GATE) U1.22(BGATE)
N1108310: C68.1 U16.4(BYPASS)
N5294010: D3.2(CATHODE) R20.2
N5313100: D4.2(CATHODE) R21.2
N5315010: D5.2(CATHODE) R22.2
N5316930: D6.2(CATHODE) R23.2
N5318860: D7.2(CATHODE) R24.2
N5320800: D2.2(CATHODE) R19.2
N5320801: Q11.3(DRAIN) R19.1
N8744481: D9.2(CATHODE) R29.2
N8775371: D10.2(CATHODE) R30.2
N8780171: D11.2(CATHODE) R31.2
N8785031: D12.2(CATHODE) R32.2

Pads without a net: J3 4 12 14 16 17 18 20 22 25 26; J7 2; J11 2; J22 3; T1 7; U1 7 12; U2 6 9; U4 6 9; U5 6 9; U8 2 3 5; U10 2; U11 7; U12 3 10 11; U13 6 7 8 9 13 17 18 20 29 30 31 32 35 36 37 42 43 45 47; U14 6 7

## Via types
v1: diameter 0.711, hole 0.381, TOP to BOTTOM, 320 vias

## Routing (per net, layer and track width the routed paths; a pad name or vN(x,y) marks a point on that pad's centre or on a via; arc(x,y) is an arc through that point)
1.8V: length 116.8
  TOP w0.203: U2.8 69.34,35.17 69.34,33.53 71.19,31.68 v1(71.19,29.64) C20.2 v1(74.17,29.64) C19.2 79.19,29.64 U5.1 79.32,30.36 79.95,30.99 83.23,30.99 ; U2.1 65.22,29.64 v1(64.08,29.64) ; v1(76.71,47.24) 76.71,48.26 76.2,48.77 U12.1 ; U5.8 83.23,30.99 ; 83.23,30.99 84.33,30.99 85.67,29.64 C16.2 C15.2 93.16,29.64 U4.1 93.29,30.56 95,32.26 95.25,32.26 97.2,34.2 U4.8 ; v1(56.64,14.73) 52.2,14.73 J23.2 ; R25.2 R26.2 v1(65.7,23.61) ; v1(73.66,55.12) U12.7
  INNER_POWER w0.203: v1(64.08,29.64) 64.66,30.23 70.61,30.23 v1(71.19,29.64)
  BOTTOM w0.203: v1(65.7,23.61) 65.55,23.61 64.08,25.07 v1(64.08,29.64) 63.17,29.64 62.48,28.96 62.48,20.57 v1(56.64,14.73) ; v1(73.66,55.12) 74.93,53.85 74.93,49.02 v1(76.71,47.24) 76.71,40.13 74.17,37.59 v1(74.17,29.64)
1.8V_BEAGLE: length 51.3
  TOP w0.203: v1(95,11.68) 94.23,12.45 79.5,12.45 79.12,12.06 J23.1
  INNER_POWER w0.203: v1(95,11.68) 95.76,11.68 97.54,13.46 99.31,13.46 100.33,14.48 J3.1
1.8V_LINEAR: length 10
  TOP w0.203: 52.07,17.14 52.07,23.24 U16.5 52.56,24.53 C67.1
2.3V: length 6.2
  TOP w0.203: C27.1 78.87,50.26 78.87,52.7 78.74,52.83 U12.6
3.3V: length 144.7
  TOP w0.203: R35.2 97.79,9.39 97.79,13.97 98.3,14.48 v1(99.06,14.48) ; v1(70.4,65.32) v1(82.8,65.32) C29.1 ; U11.14 U11.15 U11.16 60.81,56.1 C30.1 60.73,60.56 C31.1
  TOP w0.381: 91.01,71.81 91.72,71.1 C28.1 C29.1
  TOP w0.762: JP4.2 96.52,80.39 ; 96.52,80.39 95.63,80.39 92.46,77.22 92.46,73.15 91.11,71.81 U10.3 ; 96.52,80.39 v1(96.52,81.79)
  BOTTOM w0.203: C31.1 64.69,65.32 v1(70.4,65.32) ; v1(99.06,14.48) 99.06,19.81 99.57,20.32 99.57,40.89 82.8,57.66 v1(82.8,65.32)
5V: length 114.1
  TOP w0.203: R34.2 v1(92.41,10.12) ; R36.2 v1(103.21,10.08) ; U7.8 v1(59.18,45.55) ; R28.2 68.92,40.81 68.83,40.89 v1(68.83,41.16) ; R41.2 v1(135.13,10.74) ; U5.14 v1(77.72,35.26) 76.03,35.26 C22.2 C21.2 v1(70.94,35.13) ; U3.8 76.59,85.93 v1(75.44,85.93) C13.2 C14.2 ; R40.2 v1(127.76,10.74) ; v1(84.54,51.82) C26.1 84.39,52.7 U9.1 80.52,52.7 80.26,52.96 80.26,54.36 80.54,54.64 U9.3 ; R27.1 v1(65.7,41.57) ; v1(84.91,35.13) C17.2 C18.2 v1(91.95,35.13) 93.16,35.13 U4.14 ; R37.2 v1(108.92,10.12) ; v1(58.08,25.82) C66.1 57.85,24.13 U16.1 ; U6.16 v1(113.41,30.86) ; U2.14 v1(64.06,35.26)
  TOP w0.762: U10.4 88.44,70.31 87.88,70.87 87.88,74.17 88.52,74.8 U10.1 v1(89.81,78.23) v1(89.81,79.25)
  INNER_POWER w0.508: J6.2 49.53,2.29 50.8,1.02 56.39,1.02
  INNER_POWER w1.27: J9.2 34.29,80.01 JP3.2 25.91,68.07 JP2.1 ; J14.4 53.34,98.3 51.05,96.01 ; J4.2 41.27,95.63
  vias: v1(39.12,92.96) v1(62.99,77.98) v1(64.52,77.98) v1(66.04,77.98) v1(139.19,2.79)
5V_BEAGLE: length 66.8
  INNER_POWER w0.203: 100.2,18.41 J3.2
  BOTTOM w0.381: J3.2 100.97,18.41 101.6,17.78 101.6,4.56 98.05,1.02 54.23,1.02 J6.1
5V_JUMPERED: length 98.9
  TOP w0.203: v1(46.36,15.67) R9.2 ; v1(18.54,20.83) 17.78,21.59 Q5.3 v1(17.78,30.73) ; v1(22.86,15.67) R7.2 ; R8.2 v1(17.27,15.67) R5.2 ; v1(27.94,15.67) R6.2 ; v1(31.75,15.67) R4.2
  INNER_POWER w0.203: v1(22.86,15.67) v1(27.94,15.67) v1(31.75,15.67) 31.75,17.14 34.29,19.68 45.09,19.68 46.36,18.41 v1(46.36,15.67) ; v1(22.86,15.67) 22.86,16.51 v1(18.54,20.83) ; v1(22.86,15.67) v1(17.27,15.67) 17.2,15.67 ; JP2.2 15.24,54.86 15.24,33.27 v1(17.78,30.73)
+3.3V: length 100.6
  TOP w0.203: U13.39 U13.41 v1(105.03,49.64) 105.03,48.84 C49.1 ; C48.1 v1(100.97,49.66) 101.03,49.72 U13.33 ; D24.1 143.87,37.08 v1(142.24,37.08) ; C46.1 99.04,57.99 v1(99.06,57.99) U13.19 ; v1(102.62,61.72) 102.62,61.21 103.03,60.8 U13.12 ; v1(99.06,53.59) 99.46,53.99 U13.27 ; v1(99.06,53.59) 98.68,53.21 C47.1 ; v1(99.06,53.59) 99.16,53.5 U13.28 ; U14.8 v1(92.2,57.15) ; T1.9 141.53,19.81 143.76,19.81 144.53,19.05 144.53,16 143.91,15.39 D25.1 ; C59.1 v1(93.22,60.09) ; C50.1 107.53,48.91 v1(107.53,49.64) U13.46
  TOP w0.508: FB2.1 v1(103.02,67.31) ; FB2.1 v1(103.02,64.01) ; FB2.1 v1(101.85,65.57)
  INNER_POWER w0.203: T1.12 136.45,35.81 125.22,35.81 122.17,38.86 108.92,38.86 108.46,39.32 108.46,39.62
  INNER_POWER w1.27: 103.38,76.45 113.03,76.45 115.82,79.25 JP4.1
  BOTTOM w0.203: v1(142.24,37.08) 139.9,34.75 T1.12 139.9,24.94 141.48,23.37 141.48,19.76 T1.9
  vias: v1(99.82,73.41)
+5V:
  vias: v1(122.43,82.8) v1(123.44,82.8) v1(123.95,83.82) v1(124.46,82.8)
GND_CHASSIS: length 5.6
  TOP w0.762: R62.2 141.55,14.81 v1(143.26,16.51)
  BOTTOM w0.762: v1(143.26,16.51) v1(143.26,17.53)
  vias: v1(134.37,15.24)
GND_USB: length 3
  TOP w0.762: C44.2 v1(130.98,38.27) ; R50.2 v1(130.98,40.56)
  vias: v1(144.02,89.41)
VBUS_DET: length 48.1
  TOP w0.203: v1(129.54,52.07) 129.54,53.53 C43.1 R49.1 127.87,53.6 R48.1 ; v1(103.53,62.23) 103.53,62.22 U13.11
  BOTTOM w0.203: v1(129.54,52.07) 128.52,51.05 126.49,51.05 121.67,46.23 112.52,46.23 108.2,50.55 108.2,57.9 107.18,58.93 105.66,58.93 103.53,61.06 v1(103.53,62.23)
VCC_USB: length 2.1
  TOP w0.203: C36.1 125.66,55.48 FB1.2
VDD18CORE: length 26.7
  TOP w0.203: U13.38 103.5,50.7 103.5,48.96 ; C53.1 103.5,48.96 ; 103.5,48.96 C52.1 ; C37.1 100.32,61.66 v1(100.84,61.14) 101.52,60.45 U13.15
  BOTTOM w0.203: v1(100.84,61.14) 100.79,61.14 100.33,60.68 100.33,51.56 103.5,48.39 C52.1
VDD18ETHPLL: length 4.8
  TOP w0.203: U13.48 108.53,49.53 C51.1 109.54,48.96 110.99,47.51 111,47.51 FB3.2
VDD18USBPLL: length 22.3
  TOP w0.203: v1(114.55,47.24) 112.96,47.24 FB3.1 ; C56.1 v1(111.51,59.44) 110.06,57.99 U13.62
  BOTTOM w0.203: v1(114.55,47.24) 116.33,49.02 116.33,56.9 115.32,57.91 112.27,57.91 111.51,58.67 v1(111.51,59.44)
VDDA33: length 55.7
  TOP w0.203: C54.1 111.63,53.47 v1(111.51,53.59) 111.1,53.99 U13.54 ; 106.04,61.09 105.72,60.76 v1(105.41,60.76) 105.1,60.76 104.78,61.09 ; 106.04,61.09 106.04,60.96 106.52,60.48 U13.5 ; 106.04,61.09 C38.1 ; R57.1 v1(112.53,45.08) ; 104.78,61.09 104.02,60.34 U13.10 ; 104.78,61.09 C39.1 ; U13.49 109.3,50.98 109.58,50.7 ; R60.1 v1(120.97,46.94) 120.97,46.93 v1(122.17,45.72) ; C55.1 109.79,59.94 v1(109.3,59.94) U13.64 ; U13.51 110.06,52.49 111,51.56 111.76,51.56 v1(112.01,51.31) 112.27,51.05 C41.1 ; R58.1 117.79,45.8 v1(116.65,46.94) 116.78,47.07 R59.1 ; 109.58,50.7 109.58,50.68 v1(109.55,50.65) ; 109.58,50.7 109.79,50.48 C40.1 ; C42.1 v1(112.14,56.01) 111.63,55.49 U13.57 ; v1(122.43,30.48) 122.43,28.89 R61.1
  TOP w0.508: v1(105.92,65.57) FB2.2 ; FB2.2 v1(104.72,67.31) ; FB2.2 v1(104.72,64.08)
  BOTTOM w0.203: v1(122.17,45.72) 122.17,44.45 123.7,42.93 123.7,31.75 v1(122.43,30.48) ; v1(120.97,46.94) v1(116.65,46.94)
  vias: v1(108.46,73.41)
0: length 223
  TOP w0.203: U4.7 v1(98.04,29.51) ; v1(114.81,59.94) 114.3,59.44 C56.2 ; C71.2 v1(120.35,43.43) ; C66.2 v1(58.08,21.42) ; C27.2 80.58,49.22 80.77,49.02 v1(80.77,48.51) ; C67.2 v1(50.5,27.64) ; 88.39,33.42 C17.1 ; 88.39,33.42 v1(88.39,32.26) 88.39,31.35 ; 88.39,33.42 C18.1 ; v1(114.02,49.36) 113.98,49.4 C41.2 ; C16.1 88.39,31.35 ; 88.39,31.35 C15.1 ; D15.2 v1(95.81,3.61) ; U2.7 69.55,29.51 v1(70.1,28.96) ; v1(13.34,10.16) 13,9.82 R20.1 ; U1.6 v1(23.11,44.12) ; 76.45,51.05 76.45,51.82 76.25,52.02 U12.5 ; 76.45,51.05 v1(77.22,51.05) ; 76.45,51.05 76.3,51.21 U12.4 ; 76.45,51.05 76.45,49.73 76.25,49.53 75.21,49.53 U12.2 U12.12 ; 102.24,21.97 v1(102.24,20.83) ; R21.1 18.71,9.82 v1(19.05,10.16) ; C57.2 v1(127.42,66.38) ; R16.1 v1(16.26,49.83) ; R22.1 30.14,9.82 v1(30.48,10.16) ; v1(27.69,41.91) 27.94,41.91 28.19,42.16 28.7,42.16 28.78,42.24 U1.16 ; R24.1 41.57,9.82 v1(41.91,10.16) ; C53.2 102.3,47.94 v1(102.04,47.69) C48.2 ; D18.2 v1(113.34,3.61) ; R53.1 v1(142.47,59.46) ; C64.2 v1(119.17,58.72) ; C39.2 C38.2 v1(106.04,63.49) ; D13.2 v1(85.6,3.61) ; C42.2 v1(115.06,56.01) ; C47.2 v1(96.27,53.21) ; C40.2 110.81,49.15 111.24,49.15 v1(111.26,49.13) ; U5.7 v1(84.58,29.51) ; C36.2 123.61,53.42 v1(124.46,52.58) ; C3.2 v1(18.8,47.33) ; R51.2 v1(84.13,60.14) ; 17.36,39.03 17.55,38.84 R18.1 ; 17.36,39.03 C10.1 ; 17.36,39.03 v1(16.76,39.62) ; 83.57,54.61 82.63,53.67 U9.2 ; 83.57,54.61 82.3,55.88 79.5,55.88 78.87,55.24 78.87,54.64 78.84,54.66 v1(77.52,54.66) ; 83.57,54.61 83.62,54.56 C26.2 ; U3.5 v1(81.72,86.04) ; Q13.2 v1(100.71,10.67) ; C72.2 v1(117.26,36.32) ; R54.1 v1(134.62,97.39) ; C19.1 v1(75.86,32.51) 75.86,33.38 C22.1 ; C54.2 114.17,53.47 v1(114.3,53.34) ; R49.2 C43.2 v1(131.32,55.45) ; v1(100.71,30.86) U6.1 U6.2 102.24,28.32 ; R47.1 110.64,62.84 v1(110.62,62.82) C55.2 ; R23.1 35.86,9.82 v1(36.2,10.16) ; R29.1 v1(78.06,91.1) ; U13.44 106.52,53.5 v1(106.04,53.97) v1(104.78,55.24) v1(103.5,53.97) v1(102.24,52.7) 101.52,51.99 U13.34 ; 25.02,13.67 v1(25.78,13.67) ; C50.2 v1(106.17,47.69) C49.2 ; D14.2 v1(90.73,3.61) ; C7.2 43.08,54.61 C6.2 ; D19.2 v1(118.93,3.61) ; v1(60.2,46.74) 60.63,46.3 U7.7 ; R30.1 v1(62.82,91.1) ; C68.2 v1(56.22,28.87) ; C30.2 v1(63.5,56.18) ; C62.2 v1(120.7,82.8) ; Q4.2 v1(22.35,32.13) ; U11.11 U11.12 U11.13 64.06,53.44 65.23,54.61 v1(65.28,54.61) ; C59.2 v1(91.65,63.25) ; C1.2 v1(21.59,59.38) ; U16.2 U16.3 v1(56.29,26.06) ; C20.1 v1(72.69,32.51) 72.69,33.38 C21.1 ; U14.5 v1(92.2,53.34) ; C60.2 v1(129.2,82.3) ; C37.2 v1(97.79,62.8) ; C12.2 v1(16.55,41.61) ; v1(108.94,46.74) 109.09,46.89 C51.2 ; Q12.2 v1(96.9,10.67) ; C46.2 v1(97.09,59.94) ; C34.2 v1(67.31,54.51) ; R43.1 v1(15.64,67.54) ; C35.2 v1(51.36,49.73) ; R31.1 v1(71.84,7.32) ; C63.2 v1(119.21,69.51) ; J2.1 3.61,47.19 C11.2 8.56,47.19 R17.1 ; C65.2 124.63,15.32 v1(123.95,16) ; U11.1 59.13,53.9 v1(58.17,54.86) ; C70.2 v1(112.27,41.07) ; v1(71.2,82.89) C14.1 C13.1 ; R32.1 v1(79.08,11.09) ; R1.2 v1(30.23,59.38)
  TOP w0.381: C29.2 C28.2 v1(94.74,67.86) ; v1(32,45.72) 31.67,45.39 U1.21 v1(27.94,45.39)
  TOP w0.508: 28.04,83.19 C24.2 ; v1(137.92,13.1) R62.1 v1(140.97,13.1)
  TOP w0.762: D21.1 v1(26.34,86.94) ; D21.1 v1(26.34,90.86) ; D21.1 26.42,88.9 ; R62.1 v1(139.4,11.98) ; 26.42,88.9 v1(27.94,90.42) ; 26.42,88.9 v1(27.94,87.38) ; 26.42,88.9 v1(28.7,88.9) ; 127.78,39.37 C44.1 ; 127.78,39.37 v1(126.49,39.37) v1(125.48,39.37) ; 127.78,39.37 R50.1 ; v1(24.51,83.19) 25.97,83.19 ; v1(24.51,83.19) v1(24.51,84.45) ; v1(24.51,83.19) v1(24.51,81.91)
  TOP w0.889: C24.2 v1(28.24,82.03) ; 25.97,83.19 28.04,83.19
  TOP w1.524: v1(27.94,45.39) v1(27.94,44.48)
  INNER_GND w2.032: 12.95,40.64 12.95,36.83 ; 5.33,61.72 5.33,59.44 ; 5.59,73.66 5.59,70.61
  BOTTOM w0.203: v1(112.27,41.07) v1(117.14,41.07)
  vias: v1(39.12,44.96) v1(39.12,43.94) v1(39.88,44.45) v1(39.88,43.43) v1(96.52,74.17) v1(96.52,73.25) v1(96.52,72.34) v1(96.52,71.37) v1(96.52,70.46) v1(102.24,57.78) v1(102.24,56.52) v1(102.24,55.24) v1(102.24,53.97) v1(103.5,57.78) v1(103.5,56.52) v1(103.5,55.24) v1(103.5,52.7) v1(104.78,57.78) v1(104.78,56.52) v1(104.78,53.97) v1(104.78,52.7) v1(106.04,57.78) v1(106.04,56.52) v1(106.04,55.24) v1(106.04,52.7) v1(107.31,57.78) v1(107.31,56.52) v1(107.31,55.24) v1(107.31,53.97) v1(107.31,52.7) v1(124.8,85.26) v1(125.56,84.5) v1(125.73,83.49) v1(125.73,82.47)
A: length 203.3
  TOP w0.203: U3.6 79.38,86.17 79.38,87.63 81.53,89.78 81.53,89.99 81.65,90.1 81.65,96.15 79.38,98.43 J15.3
  BOTTOM w0.203: 53.59,96.01 53.59,5.59 57.4,1.78 63.25,1.78 64.64,3.17 J20.3 66.17,1.78 78.74,1.78 80.01,3.05 J21.3 ; 53.59,96.01 53.85,96.01 57.66,99.82 62.1,99.82 J10.3 63.5,98.55 65.02,100.08 77.09,100.08 J15.3 ; 53.59,96.01 17.65,96.01 J5.3
ACCEL_INT1: length 42.8
  TOP w0.203: v1(69.6,52.83) U12.8 ; v1(72.39,27.43) 72.39,26.42 76.2,22.61 76.2,17.27 74.93,16 J3.21
  BOTTOM w0.203: v1(69.6,52.83) 70.1,52.32 70.1,34.8 70.87,34.04 70.87,32.77 72.39,31.24 v1(72.39,27.43)
ACCEL_INT2: length 56.5
  TOP w0.203: J3.19 77.47,15.75 75.95,14.22 66.55,14.22 62.74,18.03 62.74,31.5 61.47,32.77 61.47,40.13 70.36,49.02 70.36,51.05 71.37,52.07 72.11,52.07 U12.9
ACP_L: length 39.5
  TOP w0.203: v1(24.43,18.5) R7.1 25.8,17.38 26.67,16.51 26.67,12.45 25.98,11.76 25.02,11.76 ; U1.3 v1(26.16,46.05)
  BOTTOM w0.203: v1(24.43,18.5) 24.43,44.49 25.98,46.05 v1(26.16,46.05)
B: length 214.4
  TOP w0.203: v1(53.59,96.77) 64.39,96.77 J10.4 ; v1(77.98,87.38) U3.7
  BOTTOM w0.203: v1(53.59,96.77) 53.34,96.77 53.09,96.52 18.54,96.52 17.78,97.28 J5.4 ; 81.28,98.3 79.76,96.77 67.69,96.77 J10.4 66.04,98.3 64.52,96.77 55.37,96.77 54.1,95.5 54.1,5.84 54.86,5.08 65.41,5.08 J20.4 67.44,3.17 68.83,4.57 81.15,4.57 J21.4 ; 81.28,98.3 J15.4 ; 81.28,98.3 81.28,90.68 v1(77.98,87.38)
BATTERY_OUT: length 52
  TOP w0.203: Q2.3 35.56,45.72 33.89,44.05 C5.1 31.97,44.12 U1.19
  TOP w1.27: Q2.2 Q2.1 v1(38.1,48.26) ; Q2.2 Q2.3 v1(35.56,48.26) ; Q2.2 v1(36.83,48.26) ; v1(35.56,48.26) v1(35.56,49.07) ; v1(35.56,48.26) v1(36.83,48.26) ; v1(36.83,48.26) v1(38.1,48.26) ; v1(38.1,48.26) v1(38.1,49.07)
  TOP w2.032: JP1.1 33.78,72.39 37.59,68.58 37.59,52.53
  INNER_POWER w1.27: v1(38.1,48.26) v1(36.83,48.26) v1(35.56,48.26) ; v1(35.56,49.07) 35.56,50.8 C4.1 ; v1(38.1,49.07) 38.1,50.16 C6.1
CHG_L: length 41.4
  TOP w0.203: Q6.1 14.86,12.32 13.21,13.97 13.21,16.26 14.33,17.38 R5.1 v1(14.9,18.8) ; v1(23.11,46.23) 23.55,46.66 U1.2
  BOTTOM w0.203: v1(14.9,18.8) 14.9,18.97 21.56,25.63 21.56,44.68 v1(23.11,46.23)
DCIN: length 14.7
  TOP w2.54: D20.2 19.81,66.55 27.43,66.55 28.19,67.31 JP1.3
DCIN_JUMPERED: length 54.8
  TOP w0.203: v1(18.54,51.56) 21.53,51.56 Q1.7 ; 24.71,47.33 C3.1 ; v1(15.24,31.24) 16,30.48 Q5.1
  TOP w0.381: v1(23.11,48.26) 23.77,48.26 U1.1
  TOP w2.032: JP1.4 33.27,64.77 34.54,63.5 34.54,58.86 33.09,57.4 31.5,57.4
  BOTTOM w0.203: v1(18.54,51.56) 16.26,51.56 15.24,50.55 v1(15.24,31.24)
  BOTTOM w0.381: v1(23.11,51.05) v1(23.11,48.26)
EECLK: length 14.7
  TOP w0.203: U13.23 96.66,56 93.98,58.67 91.19,58.67 89.92,57.4 89.92,56.39 89.41,55.88 U14.2
EECS: length 19.2
  TOP w0.203: U13.24 95.64,55.49 94.74,56.39 94.74,57.13 93.7,58.17 91.44,58.17 90.68,57.4 v1(90.68,57.15) ; R51.1 85.81,57.95 v1(86.61,57.15) U14.1
  BOTTOM w0.203: v1(90.68,57.15) v1(86.61,57.15)
EEDI: length 14.3
  TOP w0.203: U14.4 89.66,53.34 91.19,51.82 94.23,51.82 95.25,52.83 95.25,54.1 95.64,54.49 U13.26
EEDO: length 14.6
  TOP w0.203: U14.3 89.15,54.61 91.44,52.32 93.98,52.32 94.49,52.83 94.49,54.1 95.38,55 U13.25
FAULT_L: length 38.9
  TOP w0.203: R6.1 v1(27.69,17.38) 27.18,16.87 27.18,15.24 30.1,12.32 30.1,11.76 ; U1.5 v1(26.24,44.78)
  BOTTOM w0.203: v1(26.24,44.78) 25.65,44.2 25.65,19.41 v1(27.69,17.38)
FLAG_L: length 40.2
  TOP w0.203: U1.17 28.63,42.85 28.45,42.67 27.15,42.67 v1(26.9,42.42) ; v1(31.24,18.29) 32.4,18.29 R4.1 31.85,17.38 30.99,16.51 30.99,15.24 33.91,12.32 Q9.1
  BOTTOM w0.203: v1(31.24,18.29) 28.7,20.83 28.7,35.31 26.92,37.08 26.92,42.39 v1(26.9,42.42)
GPIO_1_5V: length 39.8
  TOP w0.203: U6.12 112.4,25.78 124.97,13.21 129.29,13.21 130.05,12.45 135.38,12.45 136.65,11.18 J13.1
GPIO_2_5V: length 40.4
  TOP w0.203: U6.11 111.76,24.38 112.52,24.38 124.21,12.7 129.03,12.7 129.79,11.94 135.13,11.94 138.43,8.64 J13.2
GPIO_133: length 14.7
  TOP w0.203: U5.2 79.97,27.21 81.28,25.91 81.28,17.14 J3.15
GPIO_134: length 15.5
  TOP w0.203: J3.13 83.82,17.14 83.82,24.38 80.62,27.58 U5.3
GPIO_135: length 16.3
  TOP w0.203: U5.4 81.27,27.69 86.36,22.61 86.36,17.14 J3.11
GPIO_136: length 17.1
  TOP w0.203: U5.5 81.93,27.8 88.9,20.83 88.9,17.14 J3.9
GPIO_137: length 16.6
  TOP w0.203: U4.5 95.9,28.06 96.52,27.43 96.52,17.78 96.01,17.27 94.11,17.27 J3.7
GPIO_138: length 35
  TOP w0.203: U2.4 67.3,28.45 68.58,27.18 v1(70.87,27.18)
  BOTTOM w0.203: v1(70.87,27.18) 71.88,26.16 81.53,26.16 88.9,18.8 88.9,17.53 89.15,17.27 93.85,17.27 J3.5
GPIO_139: length 44.6
  TOP w0.203: U2.5 67.96,28.56 68.33,28.19 76.2,28.19 78.74,25.65 78.74,15.24 81.03,12.95 93.22,12.95 94.23,13.97 95.76,13.97 97.66,15.87 J3.3
GPIO_LED1: length 47.3
  TOP w0.203: Q12.1 96.82,13.72 96.28,13.72 95.57,13 95.55,13 v1(95.5,12.95) ; U2.11 v1(67.3,33.53)
  BOTTOM w0.203: v1(95.5,12.95) 86.11,12.95 83.82,15.24 83.82,19.05 83.06,19.81 72.64,19.81 67.3,25.15 v1(67.3,33.53)
GPIO_LED2: length 51.1
  TOP w0.203: U2.10 67.96,34.15 v1(68.58,33.53) ; Q13.1 100.03,12.95 v1(99.82,12.95)
  BOTTOM w0.203: v1(68.58,33.53) 68.58,24.64 72.64,20.57 85.09,20.57 86.36,19.3 86.36,14.22 86.87,13.72 99.06,13.72 v1(99.82,12.95)
GPIO_SW1: length 22.1
  TOP w0.203: 111.63,21.97 124.56,9.04 R40.1 126.24,9 SW1.1
GPIO_SW2: length 29.9
  TOP w0.203: U6.10 112.9,23.24 123.95,12.19 128.78,12.19 131.93,9.04 R41.1 133.48,9 SW2.1
I2C2_SCL: length 44.2
  TOP w0.203: J3.24 71.75,18.41 68.83,21.34 66.55,21.34 64.01,23.88 64.01,25.91 64.37,26.27 R26.1 66,26.57 U2.2 66,30.77 65.28,31.5 v1(64.26,31.5) ; U12.14 73.66,48.26 73.15,47.75 70.61,47.75 63.25,40.39 v1(63.25,39.37)
  BOTTOM w0.203: v1(63.25,39.37) 63.25,32.51 v1(64.26,31.5)
I2C2_SDA: length 44.4
  TOP w0.203: J3.23 73.66,17.14 73.66,23.37 70.76,26.27 R25.1 66.65,27.85 U2.3 66.65,30.88 62.38,35.15 62.38,40.28 70.87,48.77 U12.13
ICI_L: length 47.6
  TOP w0.203: v1(31.67,39.88) 31.24,40.31 U1.13 ; Q7.1 19.3,12.19 18.54,12.95 18.54,14.22 18.8,14.48 19.56,14.48 20.07,14.99 20.07,17.02 19.71,17.38 R8.1 17.17,17.38 v1(16.76,17.78) ; v1(31.67,20.65) v1(22.86,20.65)
  BOTTOM w0.203: v1(31.67,39.88) v1(31.67,20.65) ; v1(22.86,20.65) 22.86,20.57 20.07,17.78 v1(16.76,17.78)
IND_GREEN: length 29.6
  TOP w0.203: U6.7 106.55,23.24 111.76,18.03 111.76,9.4 112.78,8.38 119.65,8.38 R39.2
IND_RED: length 22.8
  TOP w0.203: R38.2 114.64,15.92 106.17,24.38 102.36,24.38 U6.6
IR1_OUT: length 66.3
  TOP w0.203: v1(63.25,44.5) 62.03,44.5 61.29,43.76 U7.3 ; v1(66.04,57.66) 66.04,63.75 84.84,82.55 84.84,96.52 86.11,97.79 J8.1
  BOTTOM w0.203: v1(66.04,57.66) 66.04,47.75 63.25,44.96 v1(63.25,44.5)
IR2_OUT: length 71.5
  TOP w0.203: U7.4 62.1,43.18 v1(63.25,43.18) ; J12.1 91.95,97.79 90.68,96.52 85.8,96.52 85.34,96.06 85.34,82.3 66.8,63.75 v1(66.8,56.39)
  BOTTOM w0.203: v1(63.25,43.18) 66.55,46.48 66.55,55.37 66.8,55.63 v1(66.8,56.39)
LEG1: length 64.8
  TOP w0.203: J16.1 78.81,93.98 D9.1 ; U5.13 v1(79.97,39.08)
  BOTTOM w0.203: v1(79.97,39.08) 79.97,49.82 76.71,53.09 76.71,55.12 77.47,55.88 77.47,76.45 75.44,78.49 75.44,82.55 76.45,83.57 76.45,93.73 J16.1
LEG2: length 72
  TOP w0.203: U5.12 80.62,37.19 v1(81.03,37.59) ; J17.1 61.3,93.64 D10.1
  BOTTOM w0.203: J17.1 60.96,91.69 76.96,75.69 76.96,56.13 76.2,55.37 76.2,49.78 78.99,46.99 78.99,37.85 79.25,37.59 v1(81.03,37.59)
LEG3: length 41.7
  TOP w0.203: v1(68.33,22.86) v1(72.14,22.86) ; D11.1 62.57,7.28 J18.1 v1(62.23,10.16) ; v1(80.26,32.51) 81.27,33.52 U5.11 ; v1(75.69,27.18) v1(75.69,24.89)
  BOTTOM w0.203: v1(72.14,22.86) 73.66,22.86 v1(75.69,24.89) ; v1(68.33,22.86) 65.28,19.81 65.28,13.21 v1(62.23,10.16) ; v1(75.69,27.18) 75.69,27.94 v1(80.26,32.51)
LEG4: length 46.4
  TOP w0.203: D12.1 77.81,7.28 J19.1 v1(77.47,10.41) ; U5.10 v1(81.93,32.88) ; v1(87.63,23.88) 91.44,20.07 91.44,14.73 90.42,13.72 v1(82.55,13.72)
  BOTTOM w0.203: v1(82.55,13.72) 80.26,13.72 77.47,10.92 v1(77.47,10.41) ; v1(81.93,32.88) 81.93,29.58 v1(87.63,23.88)
LOBAT_L: length 60
  TOP w0.203: Q10.1 45.34,12.32 43.43,14.22 43.43,17.02 43.79,17.38 R9.1 42.56,19.56 22.1,19.56 19.38,22.28 Q4.1 20.27,33.02 21.34,33.02 25.15,36.83 25.15,38.86 26.16,39.88 26.16,41.95 25.98,42.12 25.98,42.34 25.79,42.53 25.79,42.55 25.49,42.85 U1.8
MOTOR_POWER: length 6.7
  TOP w2.032: D8.1 11.86,21.39 SW3.2
NLNKA_LED_GPIO1: length 54.6
  TOP w0.203: U13.21 98.3,56.99 v1(97.89,57.4) ; v1(105.41,40.39) 107.44,40.39 114.3,33.53 114.3,29.36 122.32,21.34 R56.1
  BOTTOM w0.203: v1(97.89,57.4) 97.89,45.11 103.12,39.88 104.9,39.88 v1(105.41,40.39)
NSPD_LED_GPIO2: length 47
  TOP w0.203: v1(96.77,57.4) 96.77,57.26 97.54,56.49 U13.22 ; R63.1 122.94,37.15 v1(122.94,39.37)
  BOTTOM w0.203: v1(96.77,57.4) 96.77,53.71 96.98,53.51 96.98,52.92 96.77,52.72 96.77,45.47 102.87,39.37 v1(122.94,39.37)
OUTX: length 2.9
  TOP w0.203: U7.5 61.93,46.74 62.38,47.18 U11.8
OUTY: length 3
  TOP w0.203: U7.6 61.29,46.66 60.81,47.14 U11.6
PRTCTL2: length 35.6
  TOP w0.203: U15.2 U15.1 v1(121.16,76.14) ; U13.14 102.03,61.21 100.84,62.4 v1(100.84,62.48)
  BOTTOM w0.203: v1(100.84,62.48) 100.84,67.82 109.16,76.14 v1(121.16,76.14)
PRTCTL3: length 42.4
  TOP w0.203: v1(121.16,77.47) 125.22,77.47 125.73,76.96 U15.3 U15.4 ; v1(99.06,59.77) U13.16
  BOTTOM w0.203: v1(121.16,77.47) 109.73,77.47 99.06,66.8 v1(99.06,59.77)
PWR2:
  vias: v1(123.19,79.25) v1(124.21,79.25) v1(125.22,79.25) v1(126.24,79.25) v1(130.05,68.83) v1(130.81,69.6) v1(131.57,70.36) v1(131.57,68.83)
RXN: length 44.9
  TOP w0.203: C69.1 115.82,42.78 ; R58.2 115.82,45.21
  TOP w0.254: U13.53 109.34,53.45 110.52,53.45 111.44,52.53 114.86,52.53 115.82,51.56 115.82,30.86 120.77,25.91 125.6,25.91 T1.6
RXP: length 48.6
  TOP w0.203: R57.2 115.36,45.08 115.37,45.08 ; C70.1 115.37,42.78
  TOP w0.254: T1.3 130.18,24.76 128.27,26.67 127.01,26.67 125.79,25.45 120.59,25.45 115.37,30.67 115.37,51.37 114.67,52.07 111.25,52.07 110.33,52.99 U13.52
SCL: length 192
  TOP w0.203: J7.3 101.09,100.84 50.55,100.84 48.26,98.55 J14.2 48.26,46.74 51.56,43.43 59.9,43.43 U7.1 v1(59.99,41.4) ; 65.7,38.52 v1(64.26,38.52) ; 65.7,38.52 R27.2 66.22,38.53 67.06,39.37 70.87,39.37 71.37,39.88 99.06,39.88 110.49,28.45 111.51,28.45 111.63,28.32 ; 65.7,38.52 65.7,38.44 66,38.14 U2.13
  BOTTOM w0.203: J7.3 J11.3 ; v1(64.26,38.52) 64.26,39.62 62.48,41.4 v1(59.99,41.4)
SDA: length 194.7
  TOP w0.203: v1(60.96,42.16) 60.63,42.49 U7.2 60.53,43.45 60.53,43.85 60.32,44.06 51.7,44.06 48.77,46.99 48.77,96.52 50.67,98.43 J14.3 50.8,98.55 52.58,100.33 100.84,100.33 102.36,98.81 102.36,97.79 102.87,97.28 104.9,97.28 106.04,98.43 ; U6.15 110.11,29.59 99.31,40.39 78.02,40.39 v1(77.62,40.79) ; U2.12 66.65,36.43 68.73,38.5 ; 68.73,38.5 R28.1 v1(77.62,38.5) ; 68.73,38.5 v1(67.83,38.5)
  BOTTOM w0.203: v1(67.83,38.5) 66.4,38.5 62.99,41.91 61.21,41.91 v1(60.96,42.16) ; v1(77.62,38.5) v1(77.62,40.79) ; 106.04,98.43 106.04,92.71
SYSTEM_POWER: length 178.8
  TOP w0.203: v1(85.4,9.09) R33.2
  TOP w0.889: JP1.2 29.72,69.85 28.96,70.61 28.96,78.49 30.48,80.01 30.48,84.07 29.87,84.69 C24.1 26.55,84.69 26.45,84.58 26.1,84.58 U8.7
  INNER_POWER w0.203: v1(55.8,8.64) 49.02,8.64
  INNER_POWER w2.032: JP1.2 40.89,69.85 46.74,64.01 46.74,21.59 49.02,19.3 49.02,8.64 48.51,8.13 11.94,8.13 10.16,9.91 SW3.1
  BOTTOM w0.203: v1(55.8,8.64) 56.26,9.09 v1(85.4,9.09)
TXN: length 60.6
  TOP w0.203: C71.1 119.08,40.28 ; R60.2 119.08,48.01
  TOP w0.254: U13.56 109.34,54.95 114.86,54.95 119.08,50.74 119.08,38.29 123.89,33.48 128.97,33.48 132.79,29.65 132.79,20.89 131,19.1 129.6,19.1 128.32,20.38 128.32,22.17 T1.2
TXP: length 58.2
  TOP w0.203: 118.62,39.37 118.6,39.35 C72.1 ; R59.2 118.62,48.01
  TOP w0.254: T1.1 129.92,21.84 129.29,21.84 128.78,21.34 128.78,20.57 129.79,19.56 130.81,19.56 132.33,21.08 132.33,29.46 128.78,33.02 123.7,33.02 118.62,38.1 118.62,50.55 114.67,54.49 U13.55
UART2_RTS: length 13.4
  TOP w0.203: v1(95.5,26.92) 95.24,27.18 U4.4
  BOTTOM w0.203: J3.10 90.17,21.59 v1(95.5,26.92)
UART2_RTS_5V: length 53.7
  TOP w0.203: U4.11 95.25,35.26 v1(95.25,37.34) ; U3.2 U3.3 v1(79.25,79.76)
  BOTTOM w0.203: v1(95.25,37.34) 79.25,53.34 v1(79.25,79.76)
UART2_RX: length 11.6
  TOP w0.203: J3.8 93.94,19.65 U4.2
UART2_RX_5V: length 53
  TOP w0.203: U4.13 93.94,37.37 v1(93.47,37.85) ; v1(76.71,79.76) U3.1
  BOTTOM w0.203: v1(93.47,37.85) 93.47,38.35 78.74,53.09 78.74,77.72 v1(76.71,79.76)
UART2_TX: length 11.4
  TOP w0.203: U4.3 94.59,19.07 J3.6
UART2_TX_5V: length 52.4
  TOP w0.203: U4.12 94.49,35.36 v1(94.49,39.12) ; U3.4 v1(80.52,79.76)
  BOTTOM w0.203: v1(94.49,39.12) 94.23,39.12 79.76,53.59 79.76,77.72 80.52,78.49 v1(80.52,79.76)
USBDM0: length 28.2
  TOP w0.279: U13.58 111.03,56 111.96,56.92 117.66,56.92 128.24,46.34 131.43,46.34 P1.2
USBDM2: length 33.5
  TOP w0.279: U13.1 108.53,61.11 109.45,62.03 109.45,63.81 118.79,73.15 133.52,73.15 P2.2
